# EAGLE board 13095-SparkFun_ACS723_Current_Sensor_Breakout-panel.v10 (EAGLE 7.5.0), part 1 of 3
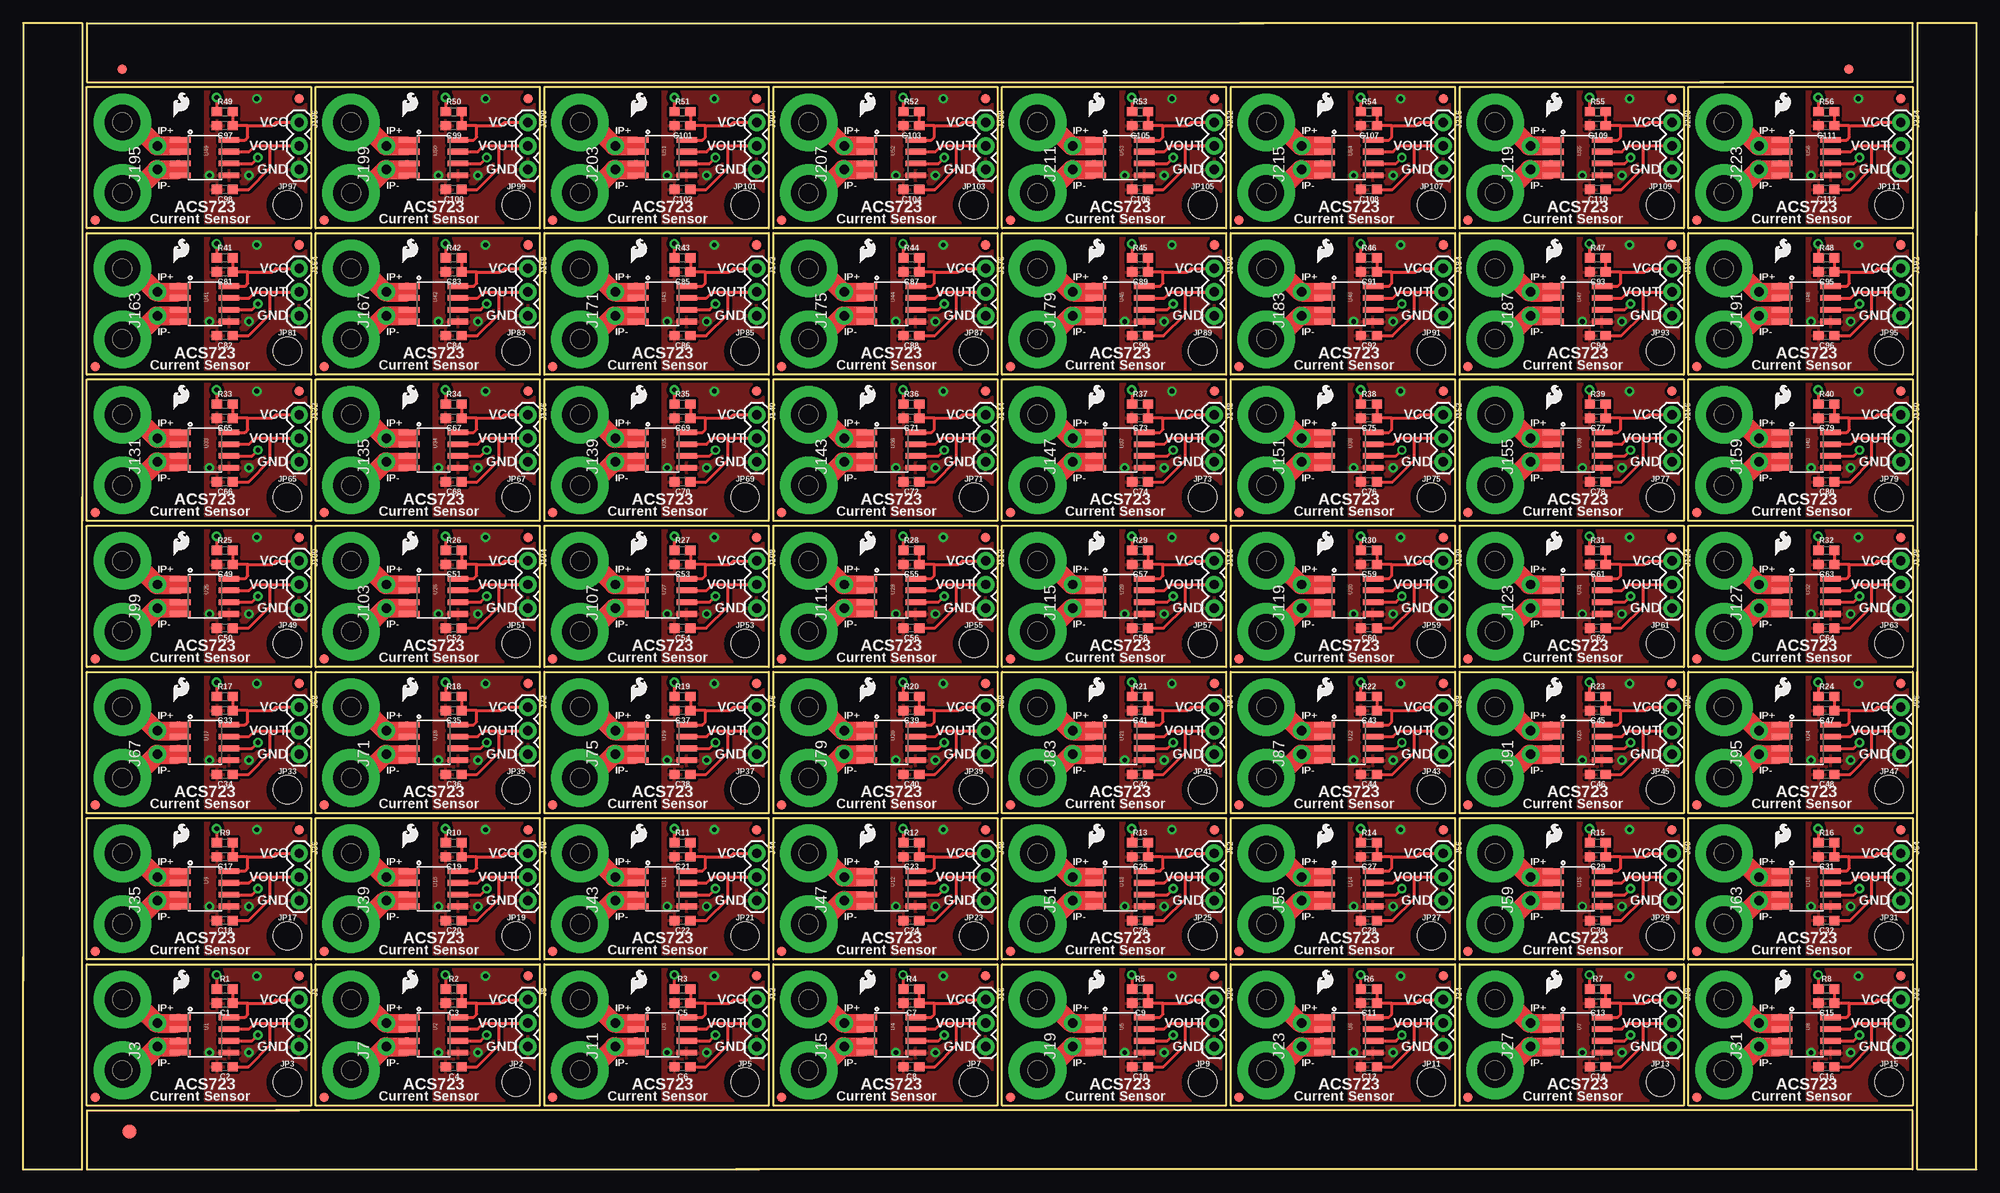
[diagram p0: board, top side]
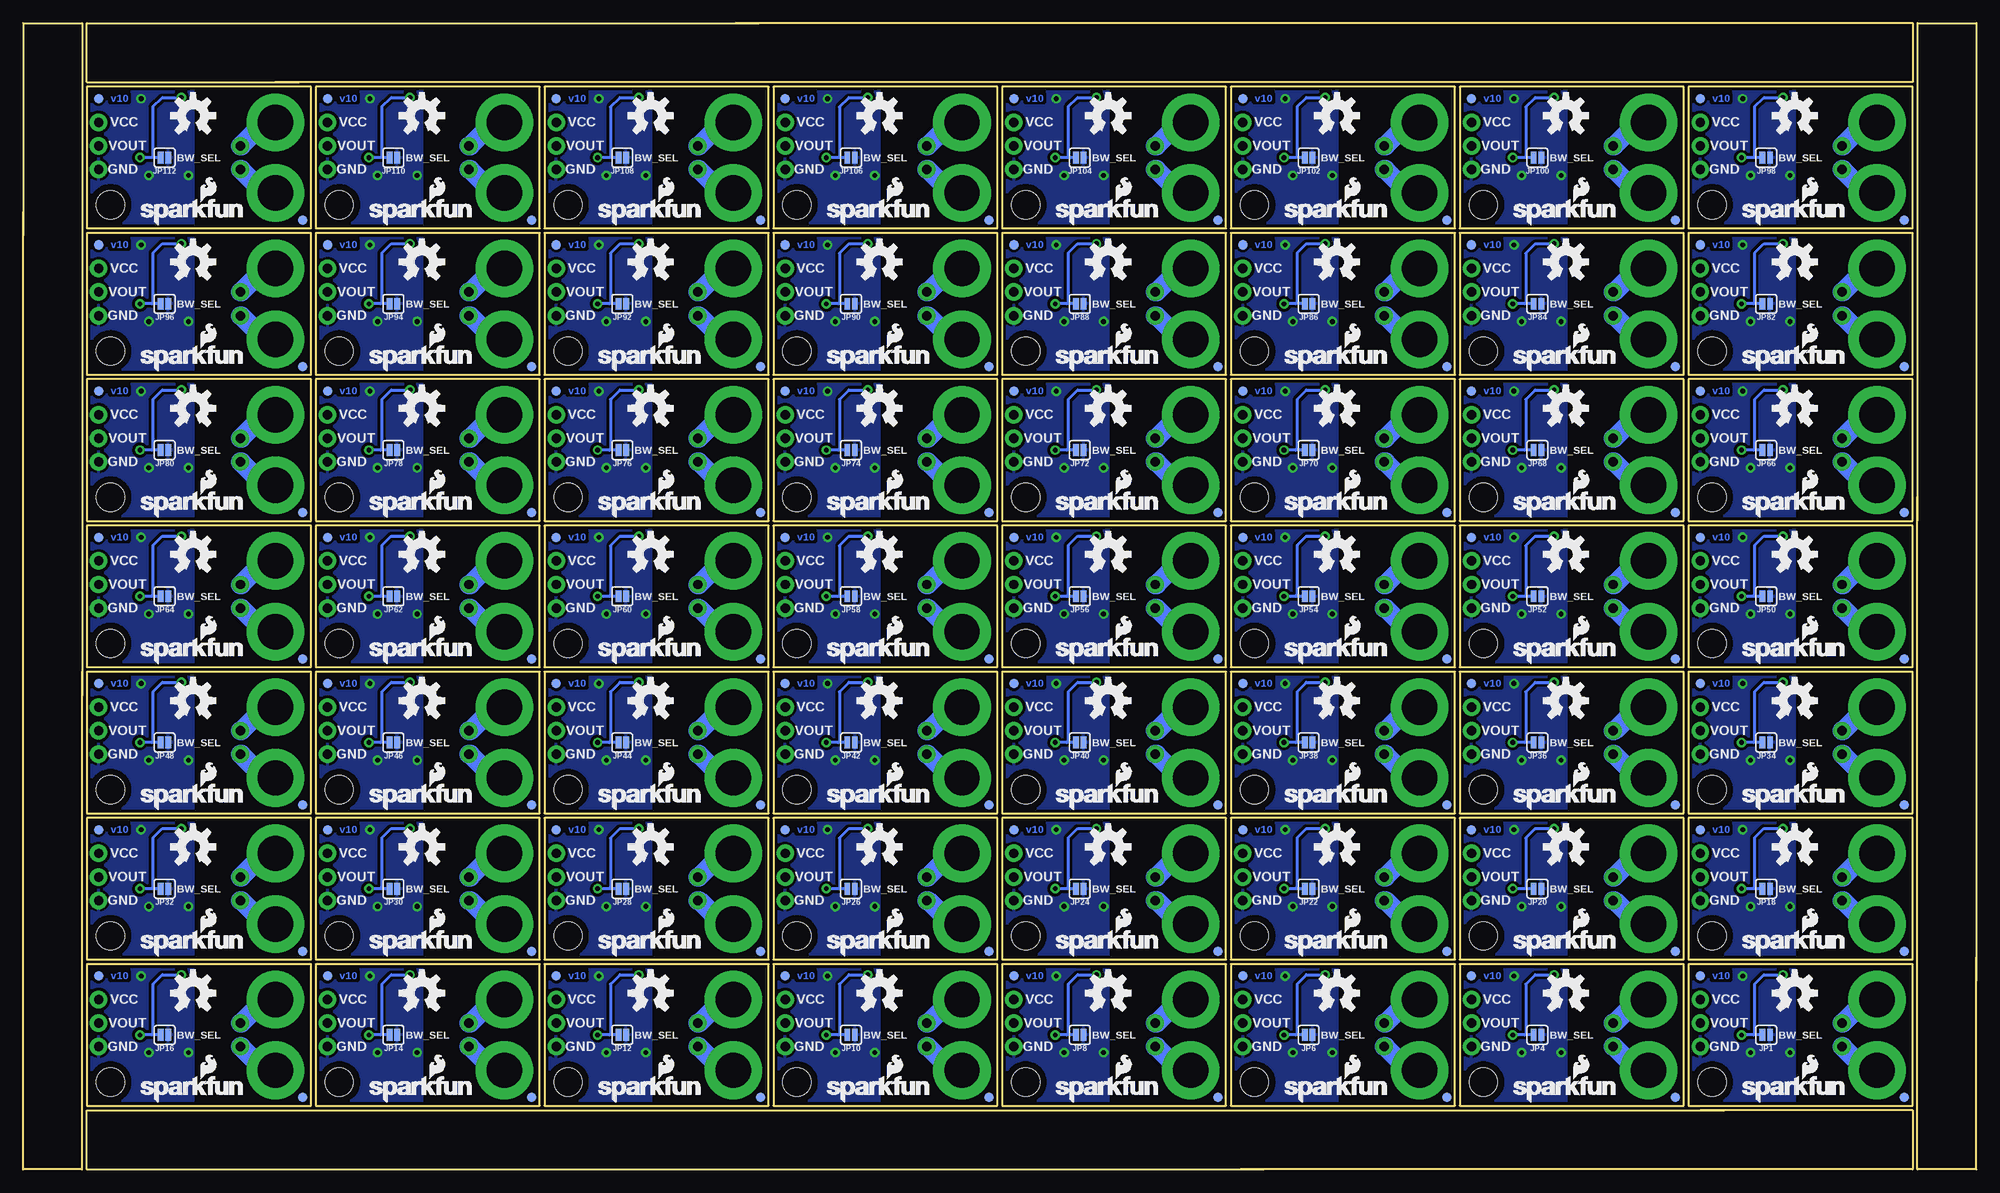
[diagram p1: board, bottom side, seen from below]

Size 210.31 x 123.44 mm. Coordinates in mm from the lower left corner, seen from the top.
Outline: 248 segments
Copper layers (1*16): Top 0.035mm / dielectric 1.5mm / Bottom 0.035mm
Design rules "SparkFun-2-layer-STANDARD": minimum track width 10mil, minimum drill 20mil, track to track 10mil, track to pad 8mil, pad to pad 8mil, via to via 10mil, smd to smd 8mil, copper to edge 8mil, drill to drill 8mil, minimum pad ring 10mil, minimum via ring 10mil, stop-mask expansion 4mil, vias tented up to drill 25mil, thermal gap 10mil
Net classes: 1 8_mil: width 0.203 mm; 2 10_mil: width 0.254 mm; 3 12_mil: width 0.305 mm; 4 15_mil: width 0.381 mm; 5 20_mil: width 0.508 mm; 6 25_mil: width 0.635 mm; 7 30_mil: width 0.762 mm

## Footprints (pad centres in the part's own frame; a part is rotated, then mirrored left to right if it is on the bottom)
0603 = smd 1.1 x 1: 1 -0.85,0; 2 0.85,0
FIDUCIAL-1.5X3 = smd 1.5 x 1.5: 1 0,0
FIDUCIAL-1X2 = smd 1 x 1: 1 0,0
1X03 = drill 1.016 pad 1.88: 1 0,0; 2 2.54,0; 3 5.08,0
SMTSO-256-ET = drill 3.81 pad 6.198: P$1 0,0
1X02_NO_SILK@1 = drill 1.016 pad 1.88: 1 0,0; 2 2.54,0
SMT-JUMPER_2_NO_SILK = smd 0.635 x 1.27: 1 -0.406,0; 2 0.406,0
STAND-OFF-TIGHT = hole 3.048: 0,0
SO08 = smd 0.61 x 2.21: 1 -1.905,-2.616; 2 -0.635,-2.616; 3 0.635,-2.616; 4 1.905,-2.616; 5 1.905,2.616; 6 0.635,2.616; 7 -0.635,2.616; 8 -1.905,2.616

## Placement (x,y rotation side)
C1  0.1uF  [0603]  21.72,17.91 180 top
C2  1nF  [0603]  21.72,11.05 180 top
C3  0.1uF  [0603]  46.35,17.91 180 top
C4  1nF  [0603]  46.35,11.05 180 top
C5  0.1uF  [0603]  70.99,17.91 180 top
C6  1nF  [0603]  70.99,11.05 180 top
C7  0.1uF  [0603]  95.63,17.91 180 top
C8  1nF  [0603]  95.63,11.05 180 top
C9  0.1uF  [0603]  120.27,17.91 180 top
C10  1nF  [0603]  120.27,11.05 180 top
C11  0.1uF  [0603]  144.91,17.91 180 top
C12  1nF  [0603]  144.91,11.05 180 top
C13  0.1uF  [0603]  169.54,17.91 180 top
C14  1nF  [0603]  169.54,11.05 180 top
C15  0.1uF  [0603]  194.18,17.91 180 top
C16  1nF  [0603]  194.18,11.05 180 top
C17  0.1uF  [0603]  21.72,33.66 180 top
C18  1nF  [0603]  21.72,26.8 180 top
C19  0.1uF  [0603]  46.35,33.66 180 top
C20  1nF  [0603]  46.35,26.8 180 top
C21  0.1uF  [0603]  70.99,33.66 180 top
C22  1nF  [0603]  70.99,26.8 180 top
C23  0.1uF  [0603]  95.63,33.66 180 top
C24  1nF  [0603]  95.63,26.8 180 top
C25  0.1uF  [0603]  120.27,33.66 180 top
C26  1nF  [0603]  120.27,26.8 180 top
C27  0.1uF  [0603]  144.91,33.66 180 top
C28  1nF  [0603]  144.91,26.8 180 top
C29  0.1uF  [0603]  169.54,33.66 180 top
C30  1nF  [0603]  169.54,26.8 180 top
C31  0.1uF  [0603]  194.18,33.66 180 top
C32  1nF  [0603]  194.18,26.8 180 top
C33  0.1uF  [0603]  21.72,49.4 180 top
C34  1nF  [0603]  21.72,42.55 180 top
C35  0.1uF  [0603]  46.35,49.4 180 top
C36  1nF  [0603]  46.35,42.55 180 top
C37  0.1uF  [0603]  70.99,49.4 180 top
C38  1nF  [0603]  70.99,42.55 180 top
C39  0.1uF  [0603]  95.63,49.4 180 top
C40  1nF  [0603]  95.63,42.55 180 top
C41  0.1uF  [0603]  120.27,49.4 180 top
C42  1nF  [0603]  120.27,42.55 180 top
C43  0.1uF  [0603]  144.91,49.4 180 top
C44  1nF  [0603]  144.91,42.55 180 top
C45  0.1uF  [0603]  169.54,49.4 180 top
C46  1nF  [0603]  169.54,42.55 180 top
C47  0.1uF  [0603]  194.18,49.4 180 top
C48  1nF  [0603]  194.18,42.55 180 top
C49  0.1uF  [0603]  21.72,65.15 180 top
C50  1nF  [0603]  21.72,58.29 180 top
C51  0.1uF  [0603]  46.35,65.15 180 top
C52  1nF  [0603]  46.35,58.29 180 top
C53  0.1uF  [0603]  70.99,65.15 180 top
C54  1nF  [0603]  70.99,58.29 180 top
C55  0.1uF  [0603]  95.63,65.15 180 top
C56  1nF  [0603]  95.63,58.29 180 top
C57  0.1uF  [0603]  120.27,65.15 180 top
C58  1nF  [0603]  120.27,58.29 180 top
C59  0.1uF  [0603]  144.91,65.15 180 top
C60  1nF  [0603]  144.91,58.29 180 top
C61  0.1uF  [0603]  169.54,65.15 180 top
C62  1nF  [0603]  169.54,58.29 180 top
C63  0.1uF  [0603]  194.18,65.15 180 top
C64  1nF  [0603]  194.18,58.29 180 top
C65  0.1uF  [0603]  21.72,80.9 180 top
C66  1nF  [0603]  21.72,74.04 180 top
C67  0.1uF  [0603]  46.35,80.9 180 top
C68  1nF  [0603]  46.35,74.04 180 top
C69  0.1uF  [0603]  70.99,80.9 180 top
C70  1nF  [0603]  70.99,74.04 180 top
C71  0.1uF  [0603]  95.63,80.9 180 top
C72  1nF  [0603]  95.63,74.04 180 top
C73  0.1uF  [0603]  120.27,80.9 180 top
C74  1nF  [0603]  120.27,74.04 180 top
C75  0.1uF  [0603]  144.91,80.9 180 top
C76  1nF  [0603]  144.91,74.04 180 top
C77  0.1uF  [0603]  169.54,80.9 180 top
C78  1nF  [0603]  169.54,74.04 180 top
C79  0.1uF  [0603]  194.18,80.9 180 top
C80  1nF  [0603]  194.18,74.04 180 top
C81  0.1uF  [0603]  21.72,96.65 180 top
C82  1nF  [0603]  21.72,89.79 180 top
C83  0.1uF  [0603]  46.35,96.65 180 top
C84  1nF  [0603]  46.35,89.79 180 top
C85  0.1uF  [0603]  70.99,96.65 180 top
C86  1nF  [0603]  70.99,89.79 180 top
C87  0.1uF  [0603]  95.63,96.65 180 top
C88  1nF  [0603]  95.63,89.79 180 top
C89  0.1uF  [0603]  120.27,96.65 180 top
C90  1nF  [0603]  120.27,89.79 180 top
C91  0.1uF  [0603]  144.91,96.65 180 top
C92  1nF  [0603]  144.91,89.79 180 top
C93  0.1uF  [0603]  169.54,96.65 180 top
C94  1nF  [0603]  169.54,89.79 180 top
C95  0.1uF  [0603]  194.18,96.65 180 top
C96  1nF  [0603]  194.18,89.79 180 top
C97  0.1uF  [0603]  21.72,112.39 180 top
C98  1nF  [0603]  21.72,105.54 180 top
C99  0.1uF  [0603]  46.35,112.39 180 top
C100  1nF  [0603]  46.35,105.54 180 top
C101  0.1uF  [0603]  70.99,112.39 180 top
C102  1nF  [0603]  70.99,105.54 180 top
C103  0.1uF  [0603]  95.63,112.39 180 top
C104  1nF  [0603]  95.63,105.54 180 top
C105  0.1uF  [0603]  120.27,112.39 180 top
C106  1nF  [0603]  120.27,105.54 180 top
C107  0.1uF  [0603]  144.91,112.39 180 top
C108  1nF  [0603]  144.91,105.54 180 top
C109  0.1uF  [0603]  169.54,112.39 180 top
C110  1nF  [0603]  169.54,105.54 180 top
C111  0.1uF  [0603]  194.18,112.39 180 top
C112  1nF  [0603]  194.18,105.54 180 top
E$1  [FIDUCIAL-1.5X3]  11.43,4.06 0 top
E$5  [FIDUCIAL-1X2]  196.6,118.49 90 top
E$6  [FIDUCIAL-1X2]  10.67,118.49 270 top
FD1  FIDUCIAL1X2  [FIDUCIAL-1X2]  32.38,7.75 0 top
FD2  FIDUCIAL1X2  [FIDUCIAL-1X2]  7.75,7.75 0 top
FD3  FIDUCIAL1X2  [FIDUCIAL-1X2]  29.72,20.83 0 bottom
FD4  FIDUCIAL1X2  [FIDUCIAL-1X2]  29.72,20.83 0 top
FD5  FIDUCIAL1X2  [FIDUCIAL-1X2]  7.75,7.75 0 bottom
FD6  FIDUCIAL1X2  [FIDUCIAL-1X2]  54.36,20.83 0 bottom
FD7  FIDUCIAL1X2  [FIDUCIAL-1X2]  54.36,20.83 0 top
FD8  FIDUCIAL1X2  [FIDUCIAL-1X2]  32.38,7.75 0 bottom
FD9  FIDUCIAL1X2  [FIDUCIAL-1X2]  57.02,7.75 0 top
FD10  FIDUCIAL1X2  [FIDUCIAL-1X2]  78.99,20.83 0 bottom
FD11  FIDUCIAL1X2  [FIDUCIAL-1X2]  78.99,20.83 0 top
FD12  FIDUCIAL1X2  [FIDUCIAL-1X2]  57.02,7.75 0 bottom
FD13  FIDUCIAL1X2  [FIDUCIAL-1X2]  81.66,7.75 0 top
FD14  FIDUCIAL1X2  [FIDUCIAL-1X2]  103.63,20.83 0 bottom
FD15  FIDUCIAL1X2  [FIDUCIAL-1X2]  103.63,20.83 0 top
FD16  FIDUCIAL1X2  [FIDUCIAL-1X2]  81.66,7.75 0 bottom
FD17  FIDUCIAL1X2  [FIDUCIAL-1X2]  106.3,7.75 0 top
FD18  FIDUCIAL1X2  [FIDUCIAL-1X2]  128.27,20.83 0 bottom
FD19  FIDUCIAL1X2  [FIDUCIAL-1X2]  128.27,20.83 0 top
FD20  FIDUCIAL1X2  [FIDUCIAL-1X2]  106.3,7.75 0 bottom
FD21  FIDUCIAL1X2  [FIDUCIAL-1X2]  130.94,7.75 0 top
FD22  FIDUCIAL1X2  [FIDUCIAL-1X2]  152.91,20.83 0 bottom
FD23  FIDUCIAL1X2  [FIDUCIAL-1X2]  152.91,20.83 0 top
FD24  FIDUCIAL1X2  [FIDUCIAL-1X2]  130.94,7.75 0 bottom
FD25  FIDUCIAL1X2  [FIDUCIAL-1X2]  155.57,7.75 0 top
FD26  FIDUCIAL1X2  [FIDUCIAL-1X2]  177.55,20.83 0 bottom
FD27  FIDUCIAL1X2  [FIDUCIAL-1X2]  177.55,20.83 0 top
FD28  FIDUCIAL1X2  [FIDUCIAL-1X2]  155.57,7.75 0 bottom
FD29  FIDUCIAL1X2  [FIDUCIAL-1X2]  180.21,7.75 0 top
FD30  FIDUCIAL1X2  [FIDUCIAL-1X2]  202.18,20.83 0 bottom
FD31  FIDUCIAL1X2  [FIDUCIAL-1X2]  202.18,20.83 0 top
FD32  FIDUCIAL1X2  [FIDUCIAL-1X2]  180.21,7.75 0 bottom
FD33  FIDUCIAL1X2  [FIDUCIAL-1X2]  7.75,23.5 0 top
FD34  FIDUCIAL1X2  [FIDUCIAL-1X2]  29.72,36.58 0 bottom
FD35  FIDUCIAL1X2  [FIDUCIAL-1X2]  29.72,36.58 0 top
FD36  FIDUCIAL1X2  [FIDUCIAL-1X2]  7.75,23.5 0 bottom
FD37  FIDUCIAL1X2  [FIDUCIAL-1X2]  32.38,23.5 0 top
FD38  FIDUCIAL1X2  [FIDUCIAL-1X2]  54.36,36.58 0 bottom
FD39  FIDUCIAL1X2  [FIDUCIAL-1X2]  54.36,36.58 0 top
FD40  FIDUCIAL1X2  [FIDUCIAL-1X2]  32.38,23.5 0 bottom
FD41  FIDUCIAL1X2  [FIDUCIAL-1X2]  57.02,23.5 0 top
FD42  FIDUCIAL1X2  [FIDUCIAL-1X2]  78.99,36.58 0 bottom
FD43  FIDUCIAL1X2  [FIDUCIAL-1X2]  78.99,36.58 0 top
FD44  FIDUCIAL1X2  [FIDUCIAL-1X2]  57.02,23.5 0 bottom
FD45  FIDUCIAL1X2  [FIDUCIAL-1X2]  81.66,23.5 0 top
FD46  FIDUCIAL1X2  [FIDUCIAL-1X2]  103.63,36.58 0 bottom
FD47  FIDUCIAL1X2  [FIDUCIAL-1X2]  103.63,36.58 0 top
FD48  FIDUCIAL1X2  [FIDUCIAL-1X2]  81.66,23.5 0 bottom
FD49  FIDUCIAL1X2  [FIDUCIAL-1X2]  106.3,23.5 0 top
FD50  FIDUCIAL1X2  [FIDUCIAL-1X2]  128.27,36.58 0 bottom
FD51  FIDUCIAL1X2  [FIDUCIAL-1X2]  128.27,36.58 0 top
FD52  FIDUCIAL1X2  [FIDUCIAL-1X2]  106.3,23.5 0 bottom
FD53  FIDUCIAL1X2  [FIDUCIAL-1X2]  130.94,23.5 0 top
FD54  FIDUCIAL1X2  [FIDUCIAL-1X2]  152.91,36.58 0 bottom
FD55  FIDUCIAL1X2  [FIDUCIAL-1X2]  152.91,36.58 0 top
FD56  FIDUCIAL1X2  [FIDUCIAL-1X2]  130.94,23.5 0 bottom
FD57  FIDUCIAL1X2  [FIDUCIAL-1X2]  155.57,23.5 0 top
FD58  FIDUCIAL1X2  [FIDUCIAL-1X2]  177.55,36.58 0 bottom
FD59  FIDUCIAL1X2  [FIDUCIAL-1X2]  177.55,36.58 0 top
FD60  FIDUCIAL1X2  [FIDUCIAL-1X2]  155.57,23.5 0 bottom
FD61  FIDUCIAL1X2  [FIDUCIAL-1X2]  180.21,23.5 0 top
FD62  FIDUCIAL1X2  [FIDUCIAL-1X2]  202.18,36.58 0 bottom
FD63  FIDUCIAL1X2  [FIDUCIAL-1X2]  202.18,36.58 0 top
FD64  FIDUCIAL1X2  [FIDUCIAL-1X2]  180.21,23.5 0 bottom
FD65  FIDUCIAL1X2  [FIDUCIAL-1X2]  7.75,39.24 0 top
FD66  FIDUCIAL1X2  [FIDUCIAL-1X2]  29.72,52.32 0 bottom
FD67  FIDUCIAL1X2  [FIDUCIAL-1X2]  29.72,52.32 0 top
FD68  FIDUCIAL1X2  [FIDUCIAL-1X2]  7.75,39.24 0 bottom
FD69  FIDUCIAL1X2  [FIDUCIAL-1X2]  32.38,39.24 0 top
FD70  FIDUCIAL1X2  [FIDUCIAL-1X2]  54.36,52.32 0 bottom
FD71  FIDUCIAL1X2  [FIDUCIAL-1X2]  54.36,52.32 0 top
FD72  FIDUCIAL1X2  [FIDUCIAL-1X2]  32.38,39.24 0 bottom
FD73  FIDUCIAL1X2  [FIDUCIAL-1X2]  57.02,39.24 0 top
FD74  FIDUCIAL1X2  [FIDUCIAL-1X2]  78.99,52.32 0 bottom
FD75  FIDUCIAL1X2  [FIDUCIAL-1X2]  78.99,52.32 0 top
FD76  FIDUCIAL1X2  [FIDUCIAL-1X2]  57.02,39.24 0 bottom
FD77  FIDUCIAL1X2  [FIDUCIAL-1X2]  81.66,39.24 0 top
FD78  FIDUCIAL1X2  [FIDUCIAL-1X2]  103.63,52.32 0 bottom
FD79  FIDUCIAL1X2  [FIDUCIAL-1X2]  103.63,52.32 0 top
FD80  FIDUCIAL1X2  [FIDUCIAL-1X2]  81.66,39.24 0 bottom
FD81  FIDUCIAL1X2  [FIDUCIAL-1X2]  106.3,39.24 0 top
FD82  FIDUCIAL1X2  [FIDUCIAL-1X2]  128.27,52.32 0 bottom
FD83  FIDUCIAL1X2  [FIDUCIAL-1X2]  128.27,52.32 0 top
FD84  FIDUCIAL1X2  [FIDUCIAL-1X2]  106.3,39.24 0 bottom
FD85  FIDUCIAL1X2  [FIDUCIAL-1X2]  130.94,39.24 0 top
FD86  FIDUCIAL1X2  [FIDUCIAL-1X2]  152.91,52.32 0 bottom
FD87  FIDUCIAL1X2  [FIDUCIAL-1X2]  152.91,52.32 0 top
FD88  FIDUCIAL1X2  [FIDUCIAL-1X2]  130.94,39.24 0 bottom
FD89  FIDUCIAL1X2  [FIDUCIAL-1X2]  155.57,39.24 0 top
FD90  FIDUCIAL1X2  [FIDUCIAL-1X2]  177.55,52.32 0 bottom
FD91  FIDUCIAL1X2  [FIDUCIAL-1X2]  177.55,52.32 0 top
FD92  FIDUCIAL1X2  [FIDUCIAL-1X2]  155.57,39.24 0 bottom
FD93  FIDUCIAL1X2  [FIDUCIAL-1X2]  180.21,39.24 0 top
FD94  FIDUCIAL1X2  [FIDUCIAL-1X2]  202.18,52.32 0 bottom
FD95  FIDUCIAL1X2  [FIDUCIAL-1X2]  202.18,52.32 0 top
FD96  FIDUCIAL1X2  [FIDUCIAL-1X2]  180.21,39.24 0 bottom
FD97  FIDUCIAL1X2  [FIDUCIAL-1X2]  7.75,54.99 0 top
FD98  FIDUCIAL1X2  [FIDUCIAL-1X2]  29.72,68.07 0 bottom
FD99  FIDUCIAL1X2  [FIDUCIAL-1X2]  29.72,68.07 0 top
FD100  FIDUCIAL1X2  [FIDUCIAL-1X2]  7.75,54.99 0 bottom
FD101  FIDUCIAL1X2  [FIDUCIAL-1X2]  32.38,54.99 0 top
FD102  FIDUCIAL1X2  [FIDUCIAL-1X2]  54.36,68.07 0 bottom
FD103  FIDUCIAL1X2  [FIDUCIAL-1X2]  54.36,68.07 0 top
FD104  FIDUCIAL1X2  [FIDUCIAL-1X2]  32.38,54.99 0 bottom
FD105  FIDUCIAL1X2  [FIDUCIAL-1X2]  57.02,54.99 0 top
FD106  FIDUCIAL1X2  [FIDUCIAL-1X2]  78.99,68.07 0 bottom
FD107  FIDUCIAL1X2  [FIDUCIAL-1X2]  78.99,68.07 0 top
FD108  FIDUCIAL1X2  [FIDUCIAL-1X2]  57.02,54.99 0 bottom
FD109  FIDUCIAL1X2  [FIDUCIAL-1X2]  81.66,54.99 0 top
FD110  FIDUCIAL1X2  [FIDUCIAL-1X2]  103.63,68.07 0 bottom
FD111  FIDUCIAL1X2  [FIDUCIAL-1X2]  103.63,68.07 0 top
FD112  FIDUCIAL1X2  [FIDUCIAL-1X2]  81.66,54.99 0 bottom
FD113  FIDUCIAL1X2  [FIDUCIAL-1X2]  106.3,54.99 0 top
FD114  FIDUCIAL1X2  [FIDUCIAL-1X2]  128.27,68.07 0 bottom
FD115  FIDUCIAL1X2  [FIDUCIAL-1X2]  128.27,68.07 0 top
FD116  FIDUCIAL1X2  [FIDUCIAL-1X2]  106.3,54.99 0 bottom
FD117  FIDUCIAL1X2  [FIDUCIAL-1X2]  130.94,54.99 0 top
FD118  FIDUCIAL1X2  [FIDUCIAL-1X2]  152.91,68.07 0 bottom
FD119  FIDUCIAL1X2  [FIDUCIAL-1X2]  152.91,68.07 0 top
FD120  FIDUCIAL1X2  [FIDUCIAL-1X2]  130.94,54.99 0 bottom
FD121  FIDUCIAL1X2  [FIDUCIAL-1X2]  155.57,54.99 0 top
FD122  FIDUCIAL1X2  [FIDUCIAL-1X2]  177.55,68.07 0 bottom
FD123  FIDUCIAL1X2  [FIDUCIAL-1X2]  177.55,68.07 0 top
FD124  FIDUCIAL1X2  [FIDUCIAL-1X2]  155.57,54.99 0 bottom
FD125  FIDUCIAL1X2  [FIDUCIAL-1X2]  180.21,54.99 0 top
FD126  FIDUCIAL1X2  [FIDUCIAL-1X2]  202.18,68.07 0 bottom
FD127  FIDUCIAL1X2  [FIDUCIAL-1X2]  202.18,68.07 0 top
FD128  FIDUCIAL1X2  [FIDUCIAL-1X2]  180.21,54.99 0 bottom
FD129  FIDUCIAL1X2  [FIDUCIAL-1X2]  7.75,70.74 0 top
FD130  FIDUCIAL1X2  [FIDUCIAL-1X2]  29.72,83.82 0 bottom
FD131  FIDUCIAL1X2  [FIDUCIAL-1X2]  29.72,83.82 0 top
FD132  FIDUCIAL1X2  [FIDUCIAL-1X2]  7.75,70.74 0 bottom
FD133  FIDUCIAL1X2  [FIDUCIAL-1X2]  32.38,70.74 0 top
FD134  FIDUCIAL1X2  [FIDUCIAL-1X2]  54.36,83.82 0 bottom
FD135  FIDUCIAL1X2  [FIDUCIAL-1X2]  54.36,83.82 0 top
FD136  FIDUCIAL1X2  [FIDUCIAL-1X2]  32.38,70.74 0 bottom
FD137  FIDUCIAL1X2  [FIDUCIAL-1X2]  57.02,70.74 0 top
FD138  FIDUCIAL1X2  [FIDUCIAL-1X2]  78.99,83.82 0 bottom
FD139  FIDUCIAL1X2  [FIDUCIAL-1X2]  78.99,83.82 0 top
FD140  FIDUCIAL1X2  [FIDUCIAL-1X2]  57.02,70.74 0 bottom
FD141  FIDUCIAL1X2  [FIDUCIAL-1X2]  81.66,70.74 0 top
FD142  FIDUCIAL1X2  [FIDUCIAL-1X2]  103.63,83.82 0 bottom
FD143  FIDUCIAL1X2  [FIDUCIAL-1X2]  103.63,83.82 0 top
FD144  FIDUCIAL1X2  [FIDUCIAL-1X2]  81.66,70.74 0 bottom
FD145  FIDUCIAL1X2  [FIDUCIAL-1X2]  106.3,70.74 0 top
FD146  FIDUCIAL1X2  [FIDUCIAL-1X2]  128.27,83.82 0 bottom
FD147  FIDUCIAL1X2  [FIDUCIAL-1X2]  128.27,83.82 0 top
FD148  FIDUCIAL1X2  [FIDUCIAL-1X2]  106.3,70.74 0 bottom
FD149  FIDUCIAL1X2  [FIDUCIAL-1X2]  130.94,70.74 0 top
FD150  FIDUCIAL1X2  [FIDUCIAL-1X2]  152.91,83.82 0 bottom
FD151  FIDUCIAL1X2  [FIDUCIAL-1X2]  152.91,83.82 0 top
FD152  FIDUCIAL1X2  [FIDUCIAL-1X2]  130.94,70.74 0 bottom
FD153  FIDUCIAL1X2  [FIDUCIAL-1X2]  155.57,70.74 0 top
FD154  FIDUCIAL1X2  [FIDUCIAL-1X2]  177.55,83.82 0 bottom
FD155  FIDUCIAL1X2  [FIDUCIAL-1X2]  177.55,83.82 0 top
FD156  FIDUCIAL1X2  [FIDUCIAL-1X2]  155.57,70.74 0 bottom
FD157  FIDUCIAL1X2  [FIDUCIAL-1X2]  180.21,70.74 0 top
FD158  FIDUCIAL1X2  [FIDUCIAL-1X2]  202.18,83.82 0 bottom
FD159  FIDUCIAL1X2  [FIDUCIAL-1X2]  202.18,83.82 0 top
FD160  FIDUCIAL1X2  [FIDUCIAL-1X2]  180.21,70.74 0 bottom
FD161  FIDUCIAL1X2  [FIDUCIAL-1X2]  7.75,86.49 0 top
FD162  FIDUCIAL1X2  [FIDUCIAL-1X2]  29.72,99.57 0 bottom
FD163  FIDUCIAL1X2  [FIDUCIAL-1X2]  29.72,99.57 0 top
FD164  FIDUCIAL1X2  [FIDUCIAL-1X2]  7.75,86.49 0 bottom
FD165  FIDUCIAL1X2  [FIDUCIAL-1X2]  32.38,86.49 0 top
FD166  FIDUCIAL1X2  [FIDUCIAL-1X2]  54.36,99.57 0 bottom
FD167  FIDUCIAL1X2  [FIDUCIAL-1X2]  54.36,99.57 0 top
FD168  FIDUCIAL1X2  [FIDUCIAL-1X2]  32.38,86.49 0 bottom
FD169  FIDUCIAL1X2  [FIDUCIAL-1X2]  57.02,86.49 0 top
FD170  FIDUCIAL1X2  [FIDUCIAL-1X2]  78.99,99.57 0 bottom
FD171  FIDUCIAL1X2  [FIDUCIAL-1X2]  78.99,99.57 0 top
FD172  FIDUCIAL1X2  [FIDUCIAL-1X2]  57.02,86.49 0 bottom
FD173  FIDUCIAL1X2  [FIDUCIAL-1X2]  81.66,86.49 0 top
FD174  FIDUCIAL1X2  [FIDUCIAL-1X2]  103.63,99.57 0 bottom
FD175  FIDUCIAL1X2  [FIDUCIAL-1X2]  103.63,99.57 0 top
FD176  FIDUCIAL1X2  [FIDUCIAL-1X2]  81.66,86.49 0 bottom
FD177  FIDUCIAL1X2  [FIDUCIAL-1X2]  106.3,86.49 0 top
FD178  FIDUCIAL1X2  [FIDUCIAL-1X2]  128.27,99.57 0 bottom
FD179  FIDUCIAL1X2  [FIDUCIAL-1X2]  128.27,99.57 0 top
FD180  FIDUCIAL1X2  [FIDUCIAL-1X2]  106.3,86.49 0 bottom
FD181  FIDUCIAL1X2  [FIDUCIAL-1X2]  130.94,86.49 0 top
FD182  FIDUCIAL1X2  [FIDUCIAL-1X2]  152.91,99.57 0 bottom
FD183  FIDUCIAL1X2  [FIDUCIAL-1X2]  152.91,99.57 0 top
FD184  FIDUCIAL1X2  [FIDUCIAL-1X2]  130.94,86.49 0 bottom
FD185  FIDUCIAL1X2  [FIDUCIAL-1X2]  155.57,86.49 0 top
FD186  FIDUCIAL1X2  [FIDUCIAL-1X2]  177.55,99.57 0 bottom
FD187  FIDUCIAL1X2  [FIDUCIAL-1X2]  177.55,99.57 0 top
FD188  FIDUCIAL1X2  [FIDUCIAL-1X2]  155.57,86.49 0 bottom
FD189  FIDUCIAL1X2  [FIDUCIAL-1X2]  180.21,86.49 0 top
FD190  FIDUCIAL1X2  [FIDUCIAL-1X2]  202.18,99.57 0 bottom
FD191  FIDUCIAL1X2  [FIDUCIAL-1X2]  202.18,99.57 0 top
FD192  FIDUCIAL1X2  [FIDUCIAL-1X2]  180.21,86.49 0 bottom
FD193  FIDUCIAL1X2  [FIDUCIAL-1X2]  7.75,102.23 0 top
FD194  FIDUCIAL1X2  [FIDUCIAL-1X2]  29.72,115.32 0 bottom
FD195  FIDUCIAL1X2  [FIDUCIAL-1X2]  29.72,115.32 0 top
FD196  FIDUCIAL1X2  [FIDUCIAL-1X2]  7.75,102.23 0 bottom
FD197  FIDUCIAL1X2  [FIDUCIAL-1X2]  32.38,102.23 0 top
FD198  FIDUCIAL1X2  [FIDUCIAL-1X2]  54.36,115.32 0 bottom
FD199  FIDUCIAL1X2  [FIDUCIAL-1X2]  54.36,115.32 0 top
FD200  FIDUCIAL1X2  [FIDUCIAL-1X2]  32.38,102.23 0 bottom
FD201  FIDUCIAL1X2  [FIDUCIAL-1X2]  57.02,102.23 0 top
FD202  FIDUCIAL1X2  [FIDUCIAL-1X2]  78.99,115.32 0 bottom
FD203  FIDUCIAL1X2  [FIDUCIAL-1X2]  78.99,115.32 0 top
FD204  FIDUCIAL1X2  [FIDUCIAL-1X2]  57.02,102.23 0 bottom
FD205  FIDUCIAL1X2  [FIDUCIAL-1X2]  81.66,102.23 0 top
FD206  FIDUCIAL1X2  [FIDUCIAL-1X2]  103.63,115.32 0 bottom
FD207  FIDUCIAL1X2  [FIDUCIAL-1X2]  103.63,115.32 0 top
FD208  FIDUCIAL1X2  [FIDUCIAL-1X2]  81.66,102.23 0 bottom
FD209  FIDUCIAL1X2  [FIDUCIAL-1X2]  106.3,102.23 0 top
FD210  FIDUCIAL1X2  [FIDUCIAL-1X2]  128.27,115.32 0 bottom
FD211  FIDUCIAL1X2  [FIDUCIAL-1X2]  128.27,115.32 0 top
FD212  FIDUCIAL1X2  [FIDUCIAL-1X2]  106.3,102.23 0 bottom
FD213  FIDUCIAL1X2  [FIDUCIAL-1X2]  130.94,102.23 0 top
FD214  FIDUCIAL1X2  [FIDUCIAL-1X2]  152.91,115.32 0 bottom
FD215  FIDUCIAL1X2  [FIDUCIAL-1X2]  152.91,115.32 0 top
FD216  FIDUCIAL1X2  [FIDUCIAL-1X2]  130.94,102.23 0 bottom
FD217  FIDUCIAL1X2  [FIDUCIAL-1X2]  155.57,102.23 0 top
FD218  FIDUCIAL1X2  [FIDUCIAL-1X2]  177.55,115.32 0 bottom
FD219  FIDUCIAL1X2  [FIDUCIAL-1X2]  177.55,115.32 0 top
FD220  FIDUCIAL1X2  [FIDUCIAL-1X2]  155.57,102.23 0 bottom
FD221  FIDUCIAL1X2  [FIDUCIAL-1X2]  180.21,102.23 0 top
FD222  FIDUCIAL1X2  [FIDUCIAL-1X2]  202.18,115.32 0 bottom
FD223  FIDUCIAL1X2  [FIDUCIAL-1X2]  202.18,115.32 0 top
FD224  FIDUCIAL1X2  [FIDUCIAL-1X2]  180.21,102.23 0 bottom
J1  455-1750-1-ND  [1X03]  29.72,18.29 270 top
J2  [SMTSO-256-ET]  10.67,18.29 0 top
J3  [1X02_NO_SILK@1]  14.48,13.21 90 top
J4  [SMTSO-256-ET]  10.67,10.67 0 top
J5  [SMTSO-256-ET]  35.31,18.29 0 top
J6  [SMTSO-256-ET]  35.31,10.67 0 top
J7  [1X02_NO_SILK@1]  39.12,13.21 90 top
J8  455-1750-1-ND  [1X03]  54.36,18.29 270 top
J9  [SMTSO-256-ET]  59.94,18.29 0 top
J10  [SMTSO-256-ET]  59.94,10.67 0 top
J11  [1X02_NO_SILK@1]  63.75,13.21 90 top
J12  455-1750-1-ND  [1X03]  78.99,18.29 270 top
J13  [SMTSO-256-ET]  84.58,18.29 0 top
J14  [SMTSO-256-ET]  84.58,10.67 0 top
J15  [1X02_NO_SILK@1]  88.39,13.21 90 top
J16  455-1750-1-ND  [1X03]  103.63,18.29 270 top
J17  [SMTSO-256-ET]  109.22,18.29 0 top
J18  [SMTSO-256-ET]  109.22,10.67 0 top
J19  [1X02_NO_SILK@1]  113.03,13.21 90 top
J20  455-1750-1-ND  [1X03]  128.27,18.29 270 top
J21  [SMTSO-256-ET]  133.86,18.29 0 top
J22  [SMTSO-256-ET]  133.86,10.67 0 top
J23  [1X02_NO_SILK@1]  137.67,13.21 90 top
J24  455-1750-1-ND  [1X03]  152.91,18.29 270 top
J25  [SMTSO-256-ET]  158.5,18.29 0 top
J26  [SMTSO-256-ET]  158.5,10.67 0 top
J27  [1X02_NO_SILK@1]  162.31,13.21 90 top
J28  455-1750-1-ND  [1X03]  177.55,18.29 270 top
J29  [SMTSO-256-ET]  183.13,18.29 0 top
J30  [SMTSO-256-ET]  183.13,10.67 0 top
J31  [1X02_NO_SILK@1]  186.94,13.21 90 top
J32  455-1750-1-ND  [1X03]  202.18,18.29 270 top
J33  [SMTSO-256-ET]  10.67,34.04 0 top
J34  [SMTSO-256-ET]  10.67,26.42 0 top
J35  [1X02_NO_SILK@1]  14.48,28.96 90 top
J36  455-1750-1-ND  [1X03]  29.72,34.04 270 top
J37  [SMTSO-256-ET]  35.31,34.04 0 top
J38  [SMTSO-256-ET]  35.31,26.42 0 top
J39  [1X02_NO_SILK@1]  39.12,28.96 90 top
J40  455-1750-1-ND  [1X03]  54.36,34.04 270 top
J41  [SMTSO-256-ET]  59.94,34.04 0 top
J42  [SMTSO-256-ET]  59.94,26.42 0 top
J43  [1X02_NO_SILK@1]  63.75,28.96 90 top
J44  455-1750-1-ND  [1X03]  78.99,34.04 270 top
J45  [SMTSO-256-ET]  84.58,34.04 0 top
J46  [SMTSO-256-ET]  84.58,26.42 0 top
J47  [1X02_NO_SILK@1]  88.39,28.96 90 top
J48  455-1750-1-ND  [1X03]  103.63,34.04 270 top
J49  [SMTSO-256-ET]  109.22,34.04 0 top
J50  [SMTSO-256-ET]  109.22,26.42 0 top
J51  [1X02_NO_SILK@1]  113.03,28.96 90 top
J52  455-1750-1-ND  [1X03]  128.27,34.04 270 top
J53  [SMTSO-256-ET]  133.86,34.04 0 top
J54  [SMTSO-256-ET]  133.86,26.42 0 top
J55  [1X02_NO_SILK@1]  137.67,28.96 90 top
J56  455-1750-1-ND  [1X03]  152.91,34.04 270 top
J57  [SMTSO-256-ET]  158.5,34.04 0 top
J58  [SMTSO-256-ET]  158.5,26.42 0 top
J59  [1X02_NO_SILK@1]  162.31,28.96 90 top
J60  455-1750-1-ND  [1X03]  177.55,34.04 270 top
J61  [SMTSO-256-ET]  183.13,34.04 0 top
J62  [SMTSO-256-ET]  183.13,26.42 0 top
J63  [1X02_NO_SILK@1]  186.94,28.96 90 top
J64  455-1750-1-ND  [1X03]  202.18,34.04 270 top
J65  [SMTSO-256-ET]  10.67,49.78 0 top
J66  [SMTSO-256-ET]  10.67,42.16 0 top
J67  [1X02_NO_SILK@1]  14.48,44.7 90 top
J68  455-1750-1-ND  [1X03]  29.72,49.78 270 top
J69  [SMTSO-256-ET]  35.31,49.78 0 top
J70  [SMTSO-256-ET]  35.31,42.16 0 top
J71  [1X02_NO_SILK@1]  39.12,44.7 90 top
J72  455-1750-1-ND  [1X03]  54.36,49.78 270 top
J73  [SMTSO-256-ET]  59.94,49.78 0 top
J74  [SMTSO-256-ET]  59.94,42.16 0 top
J75  [1X02_NO_SILK@1]  63.75,44.7 90 top
J76  455-1750-1-ND  [1X03]  78.99,49.78 270 top
J77  [SMTSO-256-ET]  84.58,49.78 0 top
J78  [SMTSO-256-ET]  84.58,42.16 0 top
J79  [1X02_NO_SILK@1]  88.39,44.7 90 top
J80  455-1750-1-ND  [1X03]  103.63,49.78 270 top
J81  [SMTSO-256-ET]  109.22,49.78 0 top
J82  [SMTSO-256-ET]  109.22,42.16 0 top
J83  [1X02_NO_SILK@1]  113.03,44.7 90 top
J84  455-1750-1-ND  [1X03]  128.27,49.78 270 top
J85  [SMTSO-256-ET]  133.86,49.78 0 top
J86  [SMTSO-256-ET]  133.86,42.16 0 top
J87  [1X02_NO_SILK@1]  137.67,44.7 90 top
J88  455-1750-1-ND  [1X03]  152.91,49.78 270 top
J89  [SMTSO-256-ET]  158.5,49.78 0 top
J90  [SMTSO-256-ET]  158.5,42.16 0 top
J91  [1X02_NO_SILK@1]  162.31,44.7 90 top
J92  455-1750-1-ND  [1X03]  177.55,49.78 270 top
J93  [SMTSO-256-ET]  183.13,49.78 0 top
J94  [SMTSO-256-ET]  183.13,42.16 0 top
J95  [1X02_NO_SILK@1]  186.94,44.7 90 top
J96  455-1750-1-ND  [1X03]  202.18,49.78 270 top
J97  [SMTSO-256-ET]  10.67,65.53 0 top
J98  [SMTSO-256-ET]  10.67,57.91 0 top
J99  [1X02_NO_SILK@1]  14.48,60.45 90 top
J100  455-1750-1-ND  [1X03]  29.72,65.53 270 top
J101  [SMTSO-256-ET]  35.31,65.53 0 top
J102  [SMTSO-256-ET]  35.31,57.91 0 top
J103  [1X02_NO_SILK@1]  39.12,60.45 90 top
J104  455-1750-1-ND  [1X03]  54.36,65.53 270 top
J105  [SMTSO-256-ET]  59.94,65.53 0 top
J106  [SMTSO-256-ET]  59.94,57.91 0 top
J107  [1X02_NO_SILK@1]  63.75,60.45 90 top
J108  455-1750-1-ND  [1X03]  78.99,65.53 270 top
J109  [SMTSO-256-ET]  84.58,65.53 0 top
J110  [SMTSO-256-ET]  84.58,57.91 0 top
J111  [1X02_NO_SILK@1]  88.39,60.45 90 top
J112  455-1750-1-ND  [1X03]  103.63,65.53 270 top
J113  [SMTSO-256-ET]  109.22,65.53 0 top
J114  [SMTSO-256-ET]  109.22,57.91 0 top
J115  [1X02_NO_SILK@1]  113.03,60.45 90 top
J116  455-1750-1-ND  [1X03]  128.27,65.53 270 top
J117  [SMTSO-256-ET]  133.86,65.53 0 top
J118  [SMTSO-256-ET]  133.86,57.91 0 top
J119  [1X02_NO_SILK@1]  137.67,60.45 90 top
J120  455-1750-1-ND  [1X03]  152.91,65.53 270 top
J121  [SMTSO-256-ET]  158.5,65.53 0 top
J122  [SMTSO-256-ET]  158.5,57.91 0 top
J123  [1X02_NO_SILK@1]  162.31,60.45 90 top
J124  455-1750-1-ND  [1X03]  177.55,65.53 270 top
J125  [SMTSO-256-ET]  183.13,65.53 0 top
J126  [SMTSO-256-ET]  183.13,57.91 0 top
J127  [1X02_NO_SILK@1]  186.94,60.45 90 top
J128  455-1750-1-ND  [1X03]  202.18,65.53 270 top
J129  [SMTSO-256-ET]  10.67,81.28 0 top
J130  [SMTSO-256-ET]  10.67,73.66 0 top
J131  [1X02_NO_SILK@1]  14.48,76.2 90 top
J132  455-1750-1-ND  [1X03]  29.72,81.28 270 top
J133  [SMTSO-256-ET]  35.31,81.28 0 top
J134  [SMTSO-256-ET]  35.31,73.66 0 top
J135  [1X02_NO_SILK@1]  39.12,76.2 90 top
J136  455-1750-1-ND  [1X03]  54.36,81.28 270 top
J137  [SMTSO-256-ET]  59.94,81.28 0 top
J138  [SMTSO-256-ET]  59.94,73.66 0 top
J139  [1X02_NO_SILK@1]  63.75,76.2 90 top
J140  455-1750-1-ND  [1X03]  78.99,81.28 270 top
J141  [SMTSO-256-ET]  84.58,81.28 0 top
J142  [SMTSO-256-ET]  84.58,73.66 0 top
J143  [1X02_NO_SILK@1]  88.39,76.2 90 top
J144  455-1750-1-ND  [1X03]  103.63,81.28 270 top
J145  [SMTSO-256-ET]  109.22,81.28 0 top
J146  [SMTSO-256-ET]  109.22,73.66 0 top
J147  [1X02_NO_SILK@1]  113.03,76.2 90 top
J148  455-1750-1-ND  [1X03]  128.27,81.28 270 top
J149  [SMTSO-256-ET]  133.86,81.28 0 top
J150  [SMTSO-256-ET]  133.86,73.66 0 top
J151  [1X02_NO_SILK@1]  137.67,76.2 90 top
J152  455-1750-1-ND  [1X03]  152.91,81.28 270 top
J153  [SMTSO-256-ET]  158.5,81.28 0 top
J154  [SMTSO-256-ET]  158.5,73.66 0 top
J155  [1X02_NO_SILK@1]  162.31,76.2 90 top
J156  455-1750-1-ND  [1X03]  177.55,81.28 270 top
J157  [SMTSO-256-ET]  183.13,81.28 0 top
J158  [SMTSO-256-ET]  183.13,73.66 0 top
J159  [1X02_NO_SILK@1]  186.94,76.2 90 top
J160  455-1750-1-ND  [1X03]  202.18,81.28 270 top
J161  [SMTSO-256-ET]  10.67,97.03 0 top
J162  [SMTSO-256-ET]  10.67,89.41 0 top
J163  [1X02_NO_SILK@1]  14.48,91.95 90 top
J164  455-1750-1-ND  [1X03]  29.72,97.03 270 top
J165  [SMTSO-256-ET]  35.31,97.03 0 top
J166  [SMTSO-256-ET]  35.31,89.41 0 top
J167  [1X02_NO_SILK@1]  39.12,91.95 90 top
J168  455-1750-1-ND  [1X03]  54.36,97.03 270 top
J169  [SMTSO-256-ET]  59.94,97.03 0 top
J170  [SMTSO-256-ET]  59.94,89.41 0 top
J171  [1X02_NO_SILK@1]  63.75,91.95 90 top
J172  455-1750-1-ND  [1X03]  78.99,97.03 270 top
J173  [SMTSO-256-ET]  84.58,97.03 0 top
J174  [SMTSO-256-ET]  84.58,89.41 0 top
J175  [1X02_NO_SILK@1]  88.39,91.95 90 top
J176  455-1750-1-ND  [1X03]  103.63,97.03 270 top
J177  [SMTSO-256-ET]  109.22,97.03 0 top
J178  [SMTSO-256-ET]  109.22,89.41 0 top
J179  [1X02_NO_SILK@1]  113.03,91.95 90 top
J180  455-1750-1-ND  [1X03]  128.27,97.03 270 top
J181  [SMTSO-256-ET]  133.86,97.03 0 top
J182  [SMTSO-256-ET]  133.86,89.41 0 top
J183  [1X02_NO_SILK@1]  137.67,91.95 90 top
J184  455-1750-1-ND  [1X03]  152.91,97.03 270 top
J185  [SMTSO-256-ET]  158.5,97.03 0 top
J186  [SMTSO-256-ET]  158.5,89.41 0 top
J187  [1X02_NO_SILK@1]  162.31,91.95 90 top
J188  455-1750-1-ND  [1X03]  177.55,97.03 270 top
J189  [SMTSO-256-ET]  183.13,97.03 0 top
J190  [SMTSO-256-ET]  183.13,89.41 0 top
J191  [1X02_NO_SILK@1]  186.94,91.95 90 top
J192  455-1750-1-ND  [1X03]  202.18,97.03 270 top
J193  [SMTSO-256-ET]  10.67,112.78 0 top
J194  [SMTSO-256-ET]  10.67,105.16 0 top
J195  [1X02_NO_SILK@1]  14.48,107.7 90 top
J196  455-1750-1-ND  [1X03]  29.72,112.78 270 top
J197  [SMTSO-256-ET]  35.31,112.78 0 top
J198  [SMTSO-256-ET]  35.31,105.16 0 top
J199  [1X02_NO_SILK@1]  39.12,107.7 90 top
J200  455-1750-1-ND  [1X03]  54.36,112.78 270 top
J201  [SMTSO-256-ET]  59.94,112.78 0 top
J202  [SMTSO-256-ET]  59.94,105.16 0 top
J203  [1X02_NO_SILK@1]  63.75,107.7 90 top
J204  455-1750-1-ND  [1X03]  78.99,112.78 270 top
J205  [SMTSO-256-ET]  84.58,112.78 0 top
J206  [SMTSO-256-ET]  84.58,105.16 0 top
J207  [1X02_NO_SILK@1]  88.39,107.7 90 top
J208  455-1750-1-ND  [1X03]  103.63,112.78 270 top
J209  [SMTSO-256-ET]  109.22,112.78 0 top
J210  [SMTSO-256-ET]  109.22,105.16 0 top
J211  [1X02_NO_SILK@1]  113.03,107.7 90 top
J212  455-1750-1-ND  [1X03]  128.27,112.78 270 top
J213  [SMTSO-256-ET]  133.86,112.78 0 top
J214  [SMTSO-256-ET]  133.86,105.16 0 top
J215  [1X02_NO_SILK@1]  137.67,107.7 90 top
J216  455-1750-1-ND  [1X03]  152.91,112.78 270 top
J217  [SMTSO-256-ET]  158.5,112.78 0 top
J218  [SMTSO-256-ET]  158.5,105.16 0 top
J219  [1X02_NO_SILK@1]  162.31,107.7 90 top
J220  455-1750-1-ND  [1X03]  177.55,112.78 270 top
J221  [SMTSO-256-ET]  183.13,112.78 0 top
J222  [SMTSO-256-ET]  183.13,105.16 0 top
J223  [1X02_NO_SILK@1]  186.94,107.7 90 top
J224  455-1750-1-ND  [1X03]  202.18,112.78 270 top
JP1  JUMPER-SMT_2_NO_SILK  [SMT-JUMPER_2_NO_SILK]  22.62,14.48 180 bottom
JP2  STAND-OFFTIGHT  [STAND-OFF-TIGHT]  53.09,9.4 0 top
JP3  STAND-OFFTIGHT  [STAND-OFF-TIGHT]  28.45,9.4 0 top
JP4  JUMPER-SMT_2_NO_SILK  [SMT-JUMPER_2_NO_SILK]  47.26,14.48 180 bottom
JP5  STAND-OFFTIGHT  [STAND-OFF-TIGHT]  77.72,9.4 0 top
JP6  JUMPER-SMT_2_NO_SILK  [SMT-JUMPER_2_NO_SILK]  71.89,14.48 180 bottom
JP7  STAND-OFFTIGHT  [STAND-OFF-TIGHT]  102.36,9.4 0 top
JP8  JUMPER-SMT_2_NO_SILK  [SMT-JUMPER_2_NO_SILK]  96.53,14.48 180 bottom
JP9  STAND-OFFTIGHT  [STAND-OFF-TIGHT]  127,9.4 0 top
JP10  JUMPER-SMT_2_NO_SILK  [SMT-JUMPER_2_NO_SILK]  121.17,14.48 180 bottom
JP11  STAND-OFFTIGHT  [STAND-OFF-TIGHT]  151.64,9.4 0 top
JP12  JUMPER-SMT_2_NO_SILK  [SMT-JUMPER_2_NO_SILK]  145.81,14.48 180 bottom
JP13  STAND-OFFTIGHT  [STAND-OFF-TIGHT]  176.28,9.4 0 top
JP14  JUMPER-SMT_2_NO_SILK  [SMT-JUMPER_2_NO_SILK]  170.45,14.48 180 bottom
JP15  STAND-OFFTIGHT  [STAND-OFF-TIGHT]  200.91,9.4 0 top
JP16  JUMPER-SMT_2_NO_SILK  [SMT-JUMPER_2_NO_SILK]  195.08,14.48 180 bottom
JP17  STAND-OFFTIGHT  [STAND-OFF-TIGHT]  28.45,25.15 0 top
JP18  JUMPER-SMT_2_NO_SILK  [SMT-JUMPER_2_NO_SILK]  22.62,30.23 180 bottom
JP19  STAND-OFFTIGHT  [STAND-OFF-TIGHT]  53.09,25.15 0 top
JP20  JUMPER-SMT_2_NO_SILK  [SMT-JUMPER_2_NO_SILK]  47.26,30.23 180 bottom
JP21  STAND-OFFTIGHT  [STAND-OFF-TIGHT]  77.72,25.15 0 top
JP22  JUMPER-SMT_2_NO_SILK  [SMT-JUMPER_2_NO_SILK]  71.89,30.23 180 bottom
JP23  STAND-OFFTIGHT  [STAND-OFF-TIGHT]  102.36,25.15 0 top
JP24  JUMPER-SMT_2_NO_SILK  [SMT-JUMPER_2_NO_SILK]  96.53,30.23 180 bottom
JP25  STAND-OFFTIGHT  [STAND-OFF-TIGHT]  127,25.15 0 top
JP26  JUMPER-SMT_2_NO_SILK  [SMT-JUMPER_2_NO_SILK]  121.17,30.23 180 bottom
JP27  STAND-OFFTIGHT  [STAND-OFF-TIGHT]  151.64,25.15 0 top
JP28  JUMPER-SMT_2_NO_SILK  [SMT-JUMPER_2_NO_SILK]  145.81,30.23 180 bottom
JP29  STAND-OFFTIGHT  [STAND-OFF-TIGHT]  176.28,25.15 0 top
JP30  JUMPER-SMT_2_NO_SILK  [SMT-JUMPER_2_NO_SILK]  170.45,30.23 180 bottom
JP31  STAND-OFFTIGHT  [STAND-OFF-TIGHT]  200.91,25.15 0 top
JP32  JUMPER-SMT_2_NO_SILK  [SMT-JUMPER_2_NO_SILK]  195.08,30.23 180 bottom
JP33  STAND-OFFTIGHT  [STAND-OFF-TIGHT]  28.45,40.89 0 top
JP34  JUMPER-SMT_2_NO_SILK  [SMT-JUMPER_2_NO_SILK]  22.62,45.97 180 bottom
JP35  STAND-OFFTIGHT  [STAND-OFF-TIGHT]  53.09,40.89 0 top
JP36  JUMPER-SMT_2_NO_SILK  [SMT-JUMPER_2_NO_SILK]  47.26,45.97 180 bottom
JP37  STAND-OFFTIGHT  [STAND-OFF-TIGHT]  77.72,40.89 0 top
JP38  JUMPER-SMT_2_NO_SILK  [SMT-JUMPER_2_NO_SILK]  71.89,45.97 180 bottom
JP39  STAND-OFFTIGHT  [STAND-OFF-TIGHT]  102.36,40.89 0 top
JP40  JUMPER-SMT_2_NO_SILK  [SMT-JUMPER_2_NO_SILK]  96.53,45.97 180 bottom
JP41  STAND-OFFTIGHT  [STAND-OFF-TIGHT]  127,40.89 0 top
JP42  JUMPER-SMT_2_NO_SILK  [SMT-JUMPER_2_NO_SILK]  121.17,45.97 180 bottom
JP43  STAND-OFFTIGHT  [STAND-OFF-TIGHT]  151.64,40.89 0 top
JP44  JUMPER-SMT_2_NO_SILK  [SMT-JUMPER_2_NO_SILK]  145.81,45.97 180 bottom
JP45  STAND-OFFTIGHT  [STAND-OFF-TIGHT]  176.28,40.89 0 top
JP46  JUMPER-SMT_2_NO_SILK  [SMT-JUMPER_2_NO_SILK]  170.45,45.97 180 bottom
JP47  STAND-OFFTIGHT  [STAND-OFF-TIGHT]  200.91,40.89 0 top
JP48  JUMPER-SMT_2_NO_SILK  [SMT-JUMPER_2_NO_SILK]  195.08,45.97 180 bottom
JP49  STAND-OFFTIGHT  [STAND-OFF-TIGHT]  28.45,56.64 0 top
JP50  JUMPER-SMT_2_NO_SILK  [SMT-JUMPER_2_NO_SILK]  22.62,61.72 180 bottom
JP51  STAND-OFFTIGHT  [STAND-OFF-TIGHT]  53.09,56.64 0 top
JP52  JUMPER-SMT_2_NO_SILK  [SMT-JUMPER_2_NO_SILK]  47.26,61.72 180 bottom
JP53  STAND-OFFTIGHT  [STAND-OFF-TIGHT]  77.72,56.64 0 top
JP54  JUMPER-SMT_2_NO_SILK  [SMT-JUMPER_2_NO_SILK]  71.89,61.72 180 bottom
JP55  STAND-OFFTIGHT  [STAND-OFF-TIGHT]  102.36,56.64 0 top
JP56  JUMPER-SMT_2_NO_SILK  [SMT-JUMPER_2_NO_SILK]  96.53,61.72 180 bottom
JP57  STAND-OFFTIGHT  [STAND-OFF-TIGHT]  127,56.64 0 top
JP58  JUMPER-SMT_2_NO_SILK  [SMT-JUMPER_2_NO_SILK]  121.17,61.72 180 bottom
JP59  STAND-OFFTIGHT  [STAND-OFF-TIGHT]  151.64,56.64 0 top
JP60  JUMPER-SMT_2_NO_SILK  [SMT-JUMPER_2_NO_SILK]  145.81,61.72 180 bottom
JP61  STAND-OFFTIGHT  [STAND-OFF-TIGHT]  176.28,56.64 0 top
JP62  JUMPER-SMT_2_NO_SILK  [SMT-JUMPER_2_NO_SILK]  170.45,61.72 180 bottom
JP63  STAND-OFFTIGHT  [STAND-OFF-TIGHT]  200.91,56.64 0 top
JP64  JUMPER-SMT_2_NO_SILK  [SMT-JUMPER_2_NO_SILK]  195.08,61.72 180 bottom
JP65  STAND-OFFTIGHT  [STAND-OFF-TIGHT]  28.45,72.39 0 top
JP66  JUMPER-SMT_2_NO_SILK  [SMT-JUMPER_2_NO_SILK]  22.62,77.47 180 bottom
JP67  STAND-OFFTIGHT  [STAND-OFF-TIGHT]  53.09,72.39 0 top
JP68  JUMPER-SMT_2_NO_SILK  [SMT-JUMPER_2_NO_SILK]  47.26,77.47 180 bottom
JP69  STAND-OFFTIGHT  [STAND-OFF-TIGHT]  77.72,72.39 0 top
JP70  JUMPER-SMT_2_NO_SILK  [SMT-JUMPER_2_NO_SILK]  71.89,77.47 180 bottom
JP71  STAND-OFFTIGHT  [STAND-OFF-TIGHT]  102.36,72.39 0 top
JP72  JUMPER-SMT_2_NO_SILK  [SMT-JUMPER_2_NO_SILK]  96.53,77.47 180 bottom
JP73  STAND-OFFTIGHT  [STAND-OFF-TIGHT]  127,72.39 0 top
JP74  JUMPER-SMT_2_NO_SILK  [SMT-JUMPER_2_NO_SILK]  121.17,77.47 180 bottom
JP75  STAND-OFFTIGHT  [STAND-OFF-TIGHT]  151.64,72.39 0 top
JP76  JUMPER-SMT_2_NO_SILK  [SMT-JUMPER_2_NO_SILK]  145.81,77.47 180 bottom
JP77  STAND-OFFTIGHT  [STAND-OFF-TIGHT]  176.28,72.39 0 top
JP78  JUMPER-SMT_2_NO_SILK  [SMT-JUMPER_2_NO_SILK]  170.45,77.47 180 bottom
JP79  STAND-OFFTIGHT  [STAND-OFF-TIGHT]  200.91,72.39 0 top
JP80  JUMPER-SMT_2_NO_SILK  [SMT-JUMPER_2_NO_SILK]  195.08,77.47 180 bottom
JP81  STAND-OFFTIGHT  [STAND-OFF-TIGHT]  28.45,88.14 0 top
JP82  JUMPER-SMT_2_NO_SILK  [SMT-JUMPER_2_NO_SILK]  22.62,93.22 180 bottom
JP83  STAND-OFFTIGHT  [STAND-OFF-TIGHT]  53.09,88.14 0 top
JP84  JUMPER-SMT_2_NO_SILK  [SMT-JUMPER_2_NO_SILK]  47.26,93.22 180 bottom
JP85  STAND-OFFTIGHT  [STAND-OFF-TIGHT]  77.72,88.14 0 top
JP86  JUMPER-SMT_2_NO_SILK  [SMT-JUMPER_2_NO_SILK]  71.89,93.22 180 bottom
JP87  STAND-OFFTIGHT  [STAND-OFF-TIGHT]  102.36,88.14 0 top
JP88  JUMPER-SMT_2_NO_SILK  [SMT-JUMPER_2_NO_SILK]  96.53,93.22 180 bottom
JP89  STAND-OFFTIGHT  [STAND-OFF-TIGHT]  127,88.14 0 top
JP90  JUMPER-SMT_2_NO_SILK  [SMT-JUMPER_2_NO_SILK]  121.17,93.22 180 bottom
JP91  STAND-OFFTIGHT  [STAND-OFF-TIGHT]  151.64,88.14 0 top
JP92  JUMPER-SMT_2_NO_SILK  [SMT-JUMPER_2_NO_SILK]  145.81,93.22 180 bottom
JP93  STAND-OFFTIGHT  [STAND-OFF-TIGHT]  176.28,88.14 0 top
JP94  JUMPER-SMT_2_NO_SILK  [SMT-JUMPER_2_NO_SILK]  170.45,93.22 180 bottom
JP95  STAND-OFFTIGHT  [STAND-OFF-TIGHT]  200.91,88.14 0 top
JP96  JUMPER-SMT_2_NO_SILK  [SMT-JUMPER_2_NO_SILK]  195.08,93.22 180 bottom
JP97  STAND-OFFTIGHT  [STAND-OFF-TIGHT]  28.45,103.89 0 top
JP98  JUMPER-SMT_2_NO_SILK  [SMT-JUMPER_2_NO_SILK]  22.62,108.97 180 bottom
JP99  STAND-OFFTIGHT  [STAND-OFF-TIGHT]  53.09,103.89 0 top
JP100  JUMPER-SMT_2_NO_SILK  [SMT-JUMPER_2_NO_SILK]  47.26,108.97 180 bottom
JP101  STAND-OFFTIGHT  [STAND-OFF-TIGHT]  77.72,103.89 0 top
JP102  JUMPER-SMT_2_NO_SILK  [SMT-JUMPER_2_NO_SILK]  71.89,108.97 180 bottom
JP103  STAND-OFFTIGHT  [STAND-OFF-TIGHT]  102.36,103.89 0 top
JP104  JUMPER-SMT_2_NO_SILK  [SMT-JUMPER_2_NO_SILK]  96.53,108.97 180 bottom
JP105  STAND-OFFTIGHT  [STAND-OFF-TIGHT]  127,103.89 0 top
JP106  JUMPER-SMT_2_NO_SILK  [SMT-JUMPER_2_NO_SILK]  121.17,108.97 180 bottom
JP107  STAND-OFFTIGHT  [STAND-OFF-TIGHT]  151.64,103.89 0 top
JP108  JUMPER-SMT_2_NO_SILK  [SMT-JUMPER_2_NO_SILK]  145.81,108.97 180 bottom
JP109  STAND-OFFTIGHT  [STAND-OFF-TIGHT]  176.28,103.89 0 top
JP110  JUMPER-SMT_2_NO_SILK  [SMT-JUMPER_2_NO_SILK]  170.45,108.97 180 bottom
JP111  STAND-OFFTIGHT  [STAND-OFF-TIGHT]  200.91,103.89 0 top
JP112  JUMPER-SMT_2_NO_SILK  [SMT-JUMPER_2_NO_SILK]  195.08,108.97 180 bottom
LOGO1  SFE_LOGO_FLAME.1_INCH  [SFE_LOGO_FLAME_.1]  15.88,18.54 0 top
LOGO2  SFE_LOGO_FLAME.1_INCH  [SFE_LOGO_FLAME_.1]  40.51,18.54 0 top
LOGO3  SFE_LOGO_NAME_FLAME.1_INCH  [SFE_LOGO_NAME_FLAME_.1]  25.59,7.11 0 bottom
LOGO4  OSHW-LOGOM  [OSHW-LOGO-M]  19.56,18.99 0 bottom
LOGO5  SFE_LOGO_NAME_FLAME.1_INCH  [SFE_LOGO_NAME_FLAME_.1]  50.23,7.11 0 bottom
LOGO6  OSHW-LOGOM  [OSHW-LOGO-M]  44.2,18.99 0 bottom
LOGO7  SFE_LOGO_FLAME.1_INCH  [SFE_LOGO_FLAME_.1]  65.15,18.54 0 top
LOGO8  SFE_LOGO_NAME_FLAME.1_INCH  [SFE_LOGO_NAME_FLAME_.1]  74.87,7.11 0 bottom
LOGO9  OSHW-LOGOM  [OSHW-LOGO-M]  68.83,18.99 0 bottom
LOGO10  SFE_LOGO_FLAME.1_INCH  [SFE_LOGO_FLAME_.1]  89.79,18.54 0 top
LOGO11  SFE_LOGO_NAME_FLAME.1_INCH  [SFE_LOGO_NAME_FLAME_.1]  99.5,7.11 0 bottom
LOGO12  OSHW-LOGOM  [OSHW-LOGO-M]  93.47,18.99 0 bottom
LOGO13  SFE_LOGO_FLAME.1_INCH  [SFE_LOGO_FLAME_.1]  114.43,18.54 0 top
LOGO14  SFE_LOGO_NAME_FLAME.1_INCH  [SFE_LOGO_NAME_FLAME_.1]  124.14,7.11 0 bottom
LOGO15  OSHW-LOGOM  [OSHW-LOGO-M]  118.11,18.99 0 bottom
LOGO16  SFE_LOGO_FLAME.1_INCH  [SFE_LOGO_FLAME_.1]  139.06,18.54 0 top
LOGO17  SFE_LOGO_NAME_FLAME.1_INCH  [SFE_LOGO_NAME_FLAME_.1]  148.78,7.11 0 bottom
LOGO18  OSHW-LOGOM  [OSHW-LOGO-M]  142.75,18.99 0 bottom
LOGO19  SFE_LOGO_FLAME.1_INCH  [SFE_LOGO_FLAME_.1]  163.7,18.54 0 top
LOGO20  SFE_LOGO_NAME_FLAME.1_INCH  [SFE_LOGO_NAME_FLAME_.1]  173.42,7.11 0 bottom
LOGO21  OSHW-LOGOM  [OSHW-LOGO-M]  167.39,18.99 0 bottom
LOGO22  SFE_LOGO_FLAME.1_INCH  [SFE_LOGO_FLAME_.1]  188.34,18.54 0 top
LOGO23  SFE_LOGO_NAME_FLAME.1_INCH  [SFE_LOGO_NAME_FLAME_.1]  198.06,7.11 0 bottom
LOGO24  OSHW-LOGOM  [OSHW-LOGO-M]  192.02,18.99 0 bottom
LOGO25  SFE_LOGO_FLAME.1_INCH  [SFE_LOGO_FLAME_.1]  15.88,34.29 0 top
LOGO26  SFE_LOGO_NAME_FLAME.1_INCH  [SFE_LOGO_NAME_FLAME_.1]  25.59,22.86 0 bottom
LOGO27  OSHW-LOGOM  [OSHW-LOGO-M]  19.56,34.73 0 bottom
LOGO28  SFE_LOGO_FLAME.1_INCH  [SFE_LOGO_FLAME_.1]  40.51,34.29 0 top
LOGO29  SFE_LOGO_NAME_FLAME.1_INCH  [SFE_LOGO_NAME_FLAME_.1]  50.23,22.86 0 bottom
LOGO30  OSHW-LOGOM  [OSHW-LOGO-M]  44.2,34.73 0 bottom
LOGO31  SFE_LOGO_FLAME.1_INCH  [SFE_LOGO_FLAME_.1]  65.15,34.29 0 top
LOGO32  SFE_LOGO_NAME_FLAME.1_INCH  [SFE_LOGO_NAME_FLAME_.1]  74.87,22.86 0 bottom
LOGO33  OSHW-LOGOM  [OSHW-LOGO-M]  68.83,34.73 0 bottom
LOGO34  SFE_LOGO_FLAME.1_INCH  [SFE_LOGO_FLAME_.1]  89.79,34.29 0 top
LOGO35  SFE_LOGO_NAME_FLAME.1_INCH  [SFE_LOGO_NAME_FLAME_.1]  99.5,22.86 0 bottom
LOGO36  OSHW-LOGOM  [OSHW-LOGO-M]  93.47,34.73 0 bottom
LOGO37  SFE_LOGO_FLAME.1_INCH  [SFE_LOGO_FLAME_.1]  114.43,34.29 0 top
LOGO38  SFE_LOGO_NAME_FLAME.1_INCH  [SFE_LOGO_NAME_FLAME_.1]  124.14,22.86 0 bottom
LOGO39  OSHW-LOGOM  [OSHW-LOGO-M]  118.11,34.73 0 bottom
LOGO40  SFE_LOGO_FLAME.1_INCH  [SFE_LOGO_FLAME_.1]  139.06,34.29 0 top
LOGO41  SFE_LOGO_NAME_FLAME.1_INCH  [SFE_LOGO_NAME_FLAME_.1]  148.78,22.86 0 bottom
LOGO42  OSHW-LOGOM  [OSHW-LOGO-M]  142.75,34.73 0 bottom
LOGO43  SFE_LOGO_FLAME.1_INCH  [SFE_LOGO_FLAME_.1]  163.7,34.29 0 top
LOGO44  SFE_LOGO_NAME_FLAME.1_INCH  [SFE_LOGO_NAME_FLAME_.1]  173.42,22.86 0 bottom
LOGO45  OSHW-LOGOM  [OSHW-LOGO-M]  167.39,34.73 0 bottom
LOGO46  SFE_LOGO_FLAME.1_INCH  [SFE_LOGO_FLAME_.1]  188.34,34.29 0 top
LOGO47  SFE_LOGO_NAME_FLAME.1_INCH  [SFE_LOGO_NAME_FLAME_.1]  198.06,22.86 0 bottom
LOGO48  OSHW-LOGOM  [OSHW-LOGO-M]  192.02,34.73 0 bottom
LOGO49  SFE_LOGO_FLAME.1_INCH  [SFE_LOGO_FLAME_.1]  15.88,50.04 0 top
LOGO50  SFE_LOGO_NAME_FLAME.1_INCH  [SFE_LOGO_NAME_FLAME_.1]  25.59,38.61 0 bottom
LOGO51  OSHW-LOGOM  [OSHW-LOGO-M]  19.56,50.48 0 bottom
LOGO52  SFE_LOGO_FLAME.1_INCH  [SFE_LOGO_FLAME_.1]  40.51,50.04 0 top
LOGO53  SFE_LOGO_NAME_FLAME.1_INCH  [SFE_LOGO_NAME_FLAME_.1]  50.23,38.61 0 bottom
LOGO54  OSHW-LOGOM  [OSHW-LOGO-M]  44.2,50.48 0 bottom
LOGO55  SFE_LOGO_FLAME.1_INCH  [SFE_LOGO_FLAME_.1]  65.15,50.04 0 top
LOGO56  SFE_LOGO_NAME_FLAME.1_INCH  [SFE_LOGO_NAME_FLAME_.1]  74.87,38.61 0 bottom
LOGO57  OSHW-LOGOM  [OSHW-LOGO-M]  68.83,50.48 0 bottom
LOGO58  SFE_LOGO_FLAME.1_INCH  [SFE_LOGO_FLAME_.1]  89.79,50.04 0 top
LOGO59  SFE_LOGO_NAME_FLAME.1_INCH  [SFE_LOGO_NAME_FLAME_.1]  99.5,38.61 0 bottom
LOGO60  OSHW-LOGOM  [OSHW-LOGO-M]  93.47,50.48 0 bottom
LOGO61  SFE_LOGO_FLAME.1_INCH  [SFE_LOGO_FLAME_.1]  114.43,50.04 0 top
LOGO62  SFE_LOGO_NAME_FLAME.1_INCH  [SFE_LOGO_NAME_FLAME_.1]  124.14,38.61 0 bottom
LOGO63  OSHW-LOGOM  [OSHW-LOGO-M]  118.11,50.48 0 bottom
LOGO64  SFE_LOGO_FLAME.1_INCH  [SFE_LOGO_FLAME_.1]  139.06,50.04 0 top
LOGO65  SFE_LOGO_NAME_FLAME.1_INCH  [SFE_LOGO_NAME_FLAME_.1]  148.78,38.61 0 bottom
LOGO66  OSHW-LOGOM  [OSHW-LOGO-M]  142.75,50.48 0 bottom
LOGO67  SFE_LOGO_FLAME.1_INCH  [SFE_LOGO_FLAME_.1]  163.7,50.04 0 top
LOGO68  SFE_LOGO_NAME_FLAME.1_INCH  [SFE_LOGO_NAME_FLAME_.1]  173.42,38.61 0 bottom
LOGO69  OSHW-LOGOM  [OSHW-LOGO-M]  167.39,50.48 0 bottom
LOGO70  SFE_LOGO_FLAME.1_INCH  [SFE_LOGO_FLAME_.1]  188.34,50.04 0 top
LOGO71  SFE_LOGO_NAME_FLAME.1_INCH  [SFE_LOGO_NAME_FLAME_.1]  198.06,38.61 0 bottom
LOGO72  OSHW-LOGOM  [OSHW-LOGO-M]  192.02,50.48 0 bottom
LOGO73  SFE_LOGO_FLAME.1_INCH  [SFE_LOGO_FLAME_.1]  15.88,65.79 0 top
LOGO74  SFE_LOGO_NAME_FLAME.1_INCH  [SFE_LOGO_NAME_FLAME_.1]  25.59,54.36 0 bottom
LOGO75  OSHW-LOGOM  [OSHW-LOGO-M]  19.56,66.23 0 bottom
LOGO76  SFE_LOGO_FLAME.1_INCH  [SFE_LOGO_FLAME_.1]  40.51,65.79 0 top
LOGO77  SFE_LOGO_NAME_FLAME.1_INCH  [SFE_LOGO_NAME_FLAME_.1]  50.23,54.36 0 bottom
LOGO78  OSHW-LOGOM  [OSHW-LOGO-M]  44.2,66.23 0 bottom
LOGO79  SFE_LOGO_FLAME.1_INCH  [SFE_LOGO_FLAME_.1]  65.15,65.79 0 top
LOGO80  SFE_LOGO_NAME_FLAME.1_INCH  [SFE_LOGO_NAME_FLAME_.1]  74.87,54.36 0 bottom
LOGO81  OSHW-LOGOM  [OSHW-LOGO-M]  68.83,66.23 0 bottom
LOGO82  SFE_LOGO_FLAME.1_INCH  [SFE_LOGO_FLAME_.1]  89.79,65.79 0 top
LOGO83  SFE_LOGO_NAME_FLAME.1_INCH  [SFE_LOGO_NAME_FLAME_.1]  99.5,54.36 0 bottom
LOGO84  OSHW-LOGOM  [OSHW-LOGO-M]  93.47,66.23 0 bottom
LOGO85  SFE_LOGO_FLAME.1_INCH  [SFE_LOGO_FLAME_.1]  114.43,65.79 0 top
LOGO86  SFE_LOGO_NAME_FLAME.1_INCH  [SFE_LOGO_NAME_FLAME_.1]  124.14,54.36 0 bottom
LOGO87  OSHW-LOGOM  [OSHW-LOGO-M]  118.11,66.23 0 bottom
LOGO88  SFE_LOGO_FLAME.1_INCH  [SFE_LOGO_FLAME_.1]  139.06,65.79 0 top
LOGO89  SFE_LOGO_NAME_FLAME.1_INCH  [SFE_LOGO_NAME_FLAME_.1]  148.78,54.36 0 bottom
LOGO90  OSHW-LOGOM  [OSHW-LOGO-M]  142.75,66.23 0 bottom
LOGO91  SFE_LOGO_FLAME.1_INCH  [SFE_LOGO_FLAME_.1]  163.7,65.79 0 top
LOGO92  SFE_LOGO_NAME_FLAME.1_INCH  [SFE_LOGO_NAME_FLAME_.1]  173.42,54.36 0 bottom
LOGO93  OSHW-LOGOM  [OSHW-LOGO-M]  167.39,66.23 0 bottom
LOGO94  SFE_LOGO_FLAME.1_INCH  [SFE_LOGO_FLAME_.1]  188.34,65.79 0 top
LOGO95  SFE_LOGO_NAME_FLAME.1_INCH  [SFE_LOGO_NAME_FLAME_.1]  198.06,54.36 0 bottom
LOGO96  OSHW-LOGOM  [OSHW-LOGO-M]  192.02,66.23 0 bottom
LOGO97  SFE_LOGO_FLAME.1_INCH  [SFE_LOGO_FLAME_.1]  15.88,81.53 0 top
LOGO98  SFE_LOGO_NAME_FLAME.1_INCH  [SFE_LOGO_NAME_FLAME_.1]  25.59,70.1 0 bottom
LOGO99  OSHW-LOGOM  [OSHW-LOGO-M]  19.56,81.98 0 bottom
LOGO100  SFE_LOGO_FLAME.1_INCH  [SFE_LOGO_FLAME_.1]  40.51,81.53 0 top
LOGO101  SFE_LOGO_NAME_FLAME.1_INCH  [SFE_LOGO_NAME_FLAME_.1]  50.23,70.1 0 bottom
LOGO102  OSHW-LOGOM  [OSHW-LOGO-M]  44.2,81.98 0 bottom
LOGO103  SFE_LOGO_FLAME.1_INCH  [SFE_LOGO_FLAME_.1]  65.15,81.53 0 top
LOGO104  SFE_LOGO_NAME_FLAME.1_INCH  [SFE_LOGO_NAME_FLAME_.1]  74.87,70.1 0 bottom
LOGO105  OSHW-LOGOM  [OSHW-LOGO-M]  68.83,81.98 0 bottom
LOGO106  SFE_LOGO_FLAME.1_INCH  [SFE_LOGO_FLAME_.1]  89.79,81.53 0 top
LOGO107  SFE_LOGO_NAME_FLAME.1_INCH  [SFE_LOGO_NAME_FLAME_.1]  99.5,70.1 0 bottom
LOGO108  OSHW-LOGOM  [OSHW-LOGO-M]  93.47,81.98 0 bottom
LOGO109  SFE_LOGO_FLAME.1_INCH  [SFE_LOGO_FLAME_.1]  114.43,81.53 0 top
LOGO110  SFE_LOGO_NAME_FLAME.1_INCH  [SFE_LOGO_NAME_FLAME_.1]  124.14,70.1 0 bottom
LOGO111  OSHW-LOGOM  [OSHW-LOGO-M]  118.11,81.98 0 bottom
LOGO112  SFE_LOGO_FLAME.1_INCH  [SFE_LOGO_FLAME_.1]  139.06,81.53 0 top
LOGO113  SFE_LOGO_NAME_FLAME.1_INCH  [SFE_LOGO_NAME_FLAME_.1]  148.78,70.1 0 bottom
LOGO114  OSHW-LOGOM  [OSHW-LOGO-M]  142.75,81.98 0 bottom
LOGO115  SFE_LOGO_FLAME.1_INCH  [SFE_LOGO_FLAME_.1]  163.7,81.53 0 top
LOGO116  SFE_LOGO_NAME_FLAME.1_INCH  [SFE_LOGO_NAME_FLAME_.1]  173.42,70.1 0 bottom
LOGO117  OSHW-LOGOM  [OSHW-LOGO-M]  167.39,81.98 0 bottom
LOGO118  SFE_LOGO_FLAME.1_INCH  [SFE_LOGO_FLAME_.1]  188.34,81.53 0 top
LOGO119  SFE_LOGO_NAME_FLAME.1_INCH  [SFE_LOGO_NAME_FLAME_.1]  198.06,70.1 0 bottom
LOGO120  OSHW-LOGOM  [OSHW-LOGO-M]  192.02,81.98 0 bottom
LOGO121  SFE_LOGO_FLAME.1_INCH  [SFE_LOGO_FLAME_.1]  15.88,97.28 0 top
LOGO122  SFE_LOGO_NAME_FLAME.1_INCH  [SFE_LOGO_NAME_FLAME_.1]  25.59,85.85 0 bottom
LOGO123  OSHW-LOGOM  [OSHW-LOGO-M]  19.56,97.73 0 bottom
LOGO124  SFE_LOGO_FLAME.1_INCH  [SFE_LOGO_FLAME_.1]  40.51,97.28 0 top
LOGO125  SFE_LOGO_NAME_FLAME.1_INCH  [SFE_LOGO_NAME_FLAME_.1]  50.23,85.85 0 bottom
LOGO126  OSHW-LOGOM  [OSHW-LOGO-M]  44.2,97.73 0 bottom
LOGO127  SFE_LOGO_FLAME.1_INCH  [SFE_LOGO_FLAME_.1]  65.15,97.28 0 top
LOGO128  SFE_LOGO_NAME_FLAME.1_INCH  [SFE_LOGO_NAME_FLAME_.1]  74.87,85.85 0 bottom
LOGO129  OSHW-LOGOM  [OSHW-LOGO-M]  68.83,97.73 0 bottom
LOGO130  SFE_LOGO_FLAME.1_INCH  [SFE_LOGO_FLAME_.1]  89.79,97.28 0 top
LOGO131  SFE_LOGO_NAME_FLAME.1_INCH  [SFE_LOGO_NAME_FLAME_.1]  99.5,85.85 0 bottom
LOGO132  OSHW-LOGOM  [OSHW-LOGO-M]  93.47,97.73 0 bottom
LOGO133  SFE_LOGO_FLAME.1_INCH  [SFE_LOGO_FLAME_.1]  114.43,97.28 0 top
LOGO134  SFE_LOGO_NAME_FLAME.1_INCH  [SFE_LOGO_NAME_FLAME_.1]  124.14,85.85 0 bottom
LOGO135  OSHW-LOGOM  [OSHW-LOGO-M]  118.11,97.73 0 bottom
LOGO136  SFE_LOGO_FLAME.1_INCH  [SFE_LOGO_FLAME_.1]  139.06,97.28 0 top
LOGO137  SFE_LOGO_NAME_FLAME.1_INCH  [SFE_LOGO_NAME_FLAME_.1]  148.78,85.85 0 bottom
LOGO138  OSHW-LOGOM  [OSHW-LOGO-M]  142.75,97.73 0 bottom
LOGO139  SFE_LOGO_FLAME.1_INCH  [SFE_LOGO_FLAME_.1]  163.7,97.28 0 top
LOGO140  SFE_LOGO_NAME_FLAME.1_INCH  [SFE_LOGO_NAME_FLAME_.1]  173.42,85.85 0 bottom
LOGO141  OSHW-LOGOM  [OSHW-LOGO-M]  167.39,97.73 0 bottom
LOGO142  SFE_LOGO_FLAME.1_INCH  [SFE_LOGO_FLAME_.1]  188.34,97.28 0 top
LOGO143  SFE_LOGO_NAME_FLAME.1_INCH  [SFE_LOGO_NAME_FLAME_.1]  198.06,85.85 0 bottom
LOGO144  OSHW-LOGOM  [OSHW-LOGO-M]  192.02,97.73 0 bottom
LOGO145  SFE_LOGO_FLAME.1_INCH  [SFE_LOGO_FLAME_.1]  15.88,113.03 0 top
LOGO146  SFE_LOGO_NAME_FLAME.1_INCH  [SFE_LOGO_NAME_FLAME_.1]  25.59,101.6 0 bottom
LOGO147  OSHW-LOGOM  [OSHW-LOGO-M]  19.56,113.47 0 bottom
LOGO148  SFE_LOGO_FLAME.1_INCH  [SFE_LOGO_FLAME_.1]  40.51,113.03 0 top
LOGO149  SFE_LOGO_NAME_FLAME.1_INCH  [SFE_LOGO_NAME_FLAME_.1]  50.23,101.6 0 bottom
LOGO150  OSHW-LOGOM  [OSHW-LOGO-M]  44.2,113.47 0 bottom
LOGO151  SFE_LOGO_FLAME.1_INCH  [SFE_LOGO_FLAME_.1]  65.15,113.03 0 top
LOGO152  SFE_LOGO_NAME_FLAME.1_INCH  [SFE_LOGO_NAME_FLAME_.1]  74.87,101.6 0 bottom
LOGO153  OSHW-LOGOM  [OSHW-LOGO-M]  68.83,113.47 0 bottom
LOGO154  SFE_LOGO_FLAME.1_INCH  [SFE_LOGO_FLAME_.1]  89.79,113.03 0 top
LOGO155  SFE_LOGO_NAME_FLAME.1_INCH  [SFE_LOGO_NAME_FLAME_.1]  99.5,101.6 0 bottom
LOGO156  OSHW-LOGOM  [OSHW-LOGO-M]  93.47,113.47 0 bottom
LOGO157  SFE_LOGO_FLAME.1_INCH  [SFE_LOGO_FLAME_.1]  114.43,113.03 0 top
LOGO158  SFE_LOGO_NAME_FLAME.1_INCH  [SFE_LOGO_NAME_FLAME_.1]  124.14,101.6 0 bottom
LOGO159  OSHW-LOGOM  [OSHW-LOGO-M]  118.11,113.47 0 bottom
LOGO160  SFE_LOGO_FLAME.1_INCH  [SFE_LOGO_FLAME_.1]  139.06,113.03 0 top
LOGO161  SFE_LOGO_NAME_FLAME.1_INCH  [SFE_LOGO_NAME_FLAME_.1]  148.78,101.6 0 bottom
LOGO162  OSHW-LOGOM  [OSHW-LOGO-M]  142.75,113.47 0 bottom
LOGO163  SFE_LOGO_FLAME.1_INCH  [SFE_LOGO_FLAME_.1]  163.7,113.03 0 top
LOGO164  SFE_LOGO_NAME_FLAME.1_INCH  [SFE_LOGO_NAME_FLAME_.1]  173.42,101.6 0 bottom
LOGO165  OSHW-LOGOM  [OSHW-LOGO-M]  167.39,113.47 0 bottom
LOGO166  SFE_LOGO_FLAME.1_INCH  [SFE_LOGO_FLAME_.1]  188.34,113.03 0 top
LOGO167  SFE_LOGO_NAME_FLAME.1_INCH  [SFE_LOGO_NAME_FLAME_.1]  198.06,101.6 0 bottom
LOGO168  OSHW-LOGOM  [OSHW-LOGO-M]  192.02,113.47 0 bottom
R1  4.7k  [0603]  21.72,19.43 0 top
R2  4.7k  [0603]  46.35,19.43 0 top
R3  4.7k  [0603]  70.99,19.43 0 top
R4  4.7k  [0603]  95.63,19.43 0 top
R5  4.7k  [0603]  120.27,19.43 0 top
R6  4.7k  [0603]  144.91,19.43 0 top
R7  4.7k  [0603]  169.54,19.43 0 top
R8  4.7k  [0603]  194.18,19.43 0 top
R9  4.7k  [0603]  21.72,35.18 0 top
R10  4.7k  [0603]  46.35,35.18 0 top
R11  4.7k  [0603]  70.99,35.18 0 top
R12  4.7k  [0603]  95.63,35.18 0 top
R13  4.7k  [0603]  120.27,35.18 0 top
R14  4.7k  [0603]  144.91,35.18 0 top
R15  4.7k  [0603]  169.54,35.18 0 top
R16  4.7k  [0603]  194.18,35.18 0 top
R17  4.7k  [0603]  21.72,50.93 0 top
R18  4.7k  [0603]  46.35,50.93 0 top
R19  4.7k  [0603]  70.99,50.93 0 top
R20  4.7k  [0603]  95.63,50.93 0 top
R21  4.7k  [0603]  120.27,50.93 0 top
R22  4.7k  [0603]  144.91,50.93 0 top
R23  4.7k  [0603]  169.54,50.93 0 top
R24  4.7k  [0603]  194.18,50.93 0 top
R25  4.7k  [0603]  21.72,66.67 0 top
R26  4.7k  [0603]  46.35,66.67 0 top
R27  4.7k  [0603]  70.99,66.67 0 top
R28  4.7k  [0603]  95.63,66.67 0 top
R29  4.7k  [0603]  120.27,66.67 0 top
R30  4.7k  [0603]  144.91,66.67 0 top
R31  4.7k  [0603]  169.54,66.67 0 top
R32  4.7k  [0603]  194.18,66.67 0 top
R33  4.7k  [0603]  21.72,82.42 0 top
R34  4.7k  [0603]  46.35,82.42 0 top
R35  4.7k  [0603]  70.99,82.42 0 top
R36  4.7k  [0603]  95.63,82.42 0 top
R37  4.7k  [0603]  120.27,82.42 0 top
R38  4.7k  [0603]  144.91,82.42 0 top
R39  4.7k  [0603]  169.54,82.42 0 top
R40  4.7k  [0603]  194.18,82.42 0 top
R41  4.7k  [0603]  21.72,98.17 0 top
R42  4.7k  [0603]  46.35,98.17 0 top
R43  4.7k  [0603]  70.99,98.17 0 top
R44  4.7k  [0603]  95.63,98.17 0 top
R45  4.7k  [0603]  120.27,98.17 0 top
R46  4.7k  [0603]  144.91,98.17 0 top
R47  4.7k  [0603]  169.54,98.17 0 top
R48  4.7k  [0603]  194.18,98.17 0 top
R49  4.7k  [0603]  21.72,113.92 0 top
R50  4.7k  [0603]  46.35,113.92 0 top
R51  4.7k  [0603]  70.99,113.92 0 top
R52  4.7k  [0603]  95.63,113.92 0 top
R53  4.7k  [0603]  120.27,113.92 0 top
R54  4.7k  [0603]  144.91,113.92 0 top
R55  4.7k  [0603]  169.54,113.92 0 top
R56  4.7k  [0603]  194.18,113.92 0 top
U1  ACS723  [SO08]  19.56,14.48 270 top
U2  ACS723  [SO08]  44.2,14.48 270 top
U3  ACS723  [SO08]  68.83,14.48 270 top